# Altium PCB fastic-userboard.PcbDoc (part 1 of 2)
Units mm, origin at the board's own origin, x right, y up, seen from the top; angles counter-clockwise.
Board outline 60 x 60 mm, 4 copper layers (Top Layer, GND, HV, Bottom Layer), stack 1.539 mm thick; 133 components, 59 nets, 357 pads, 534 vias.
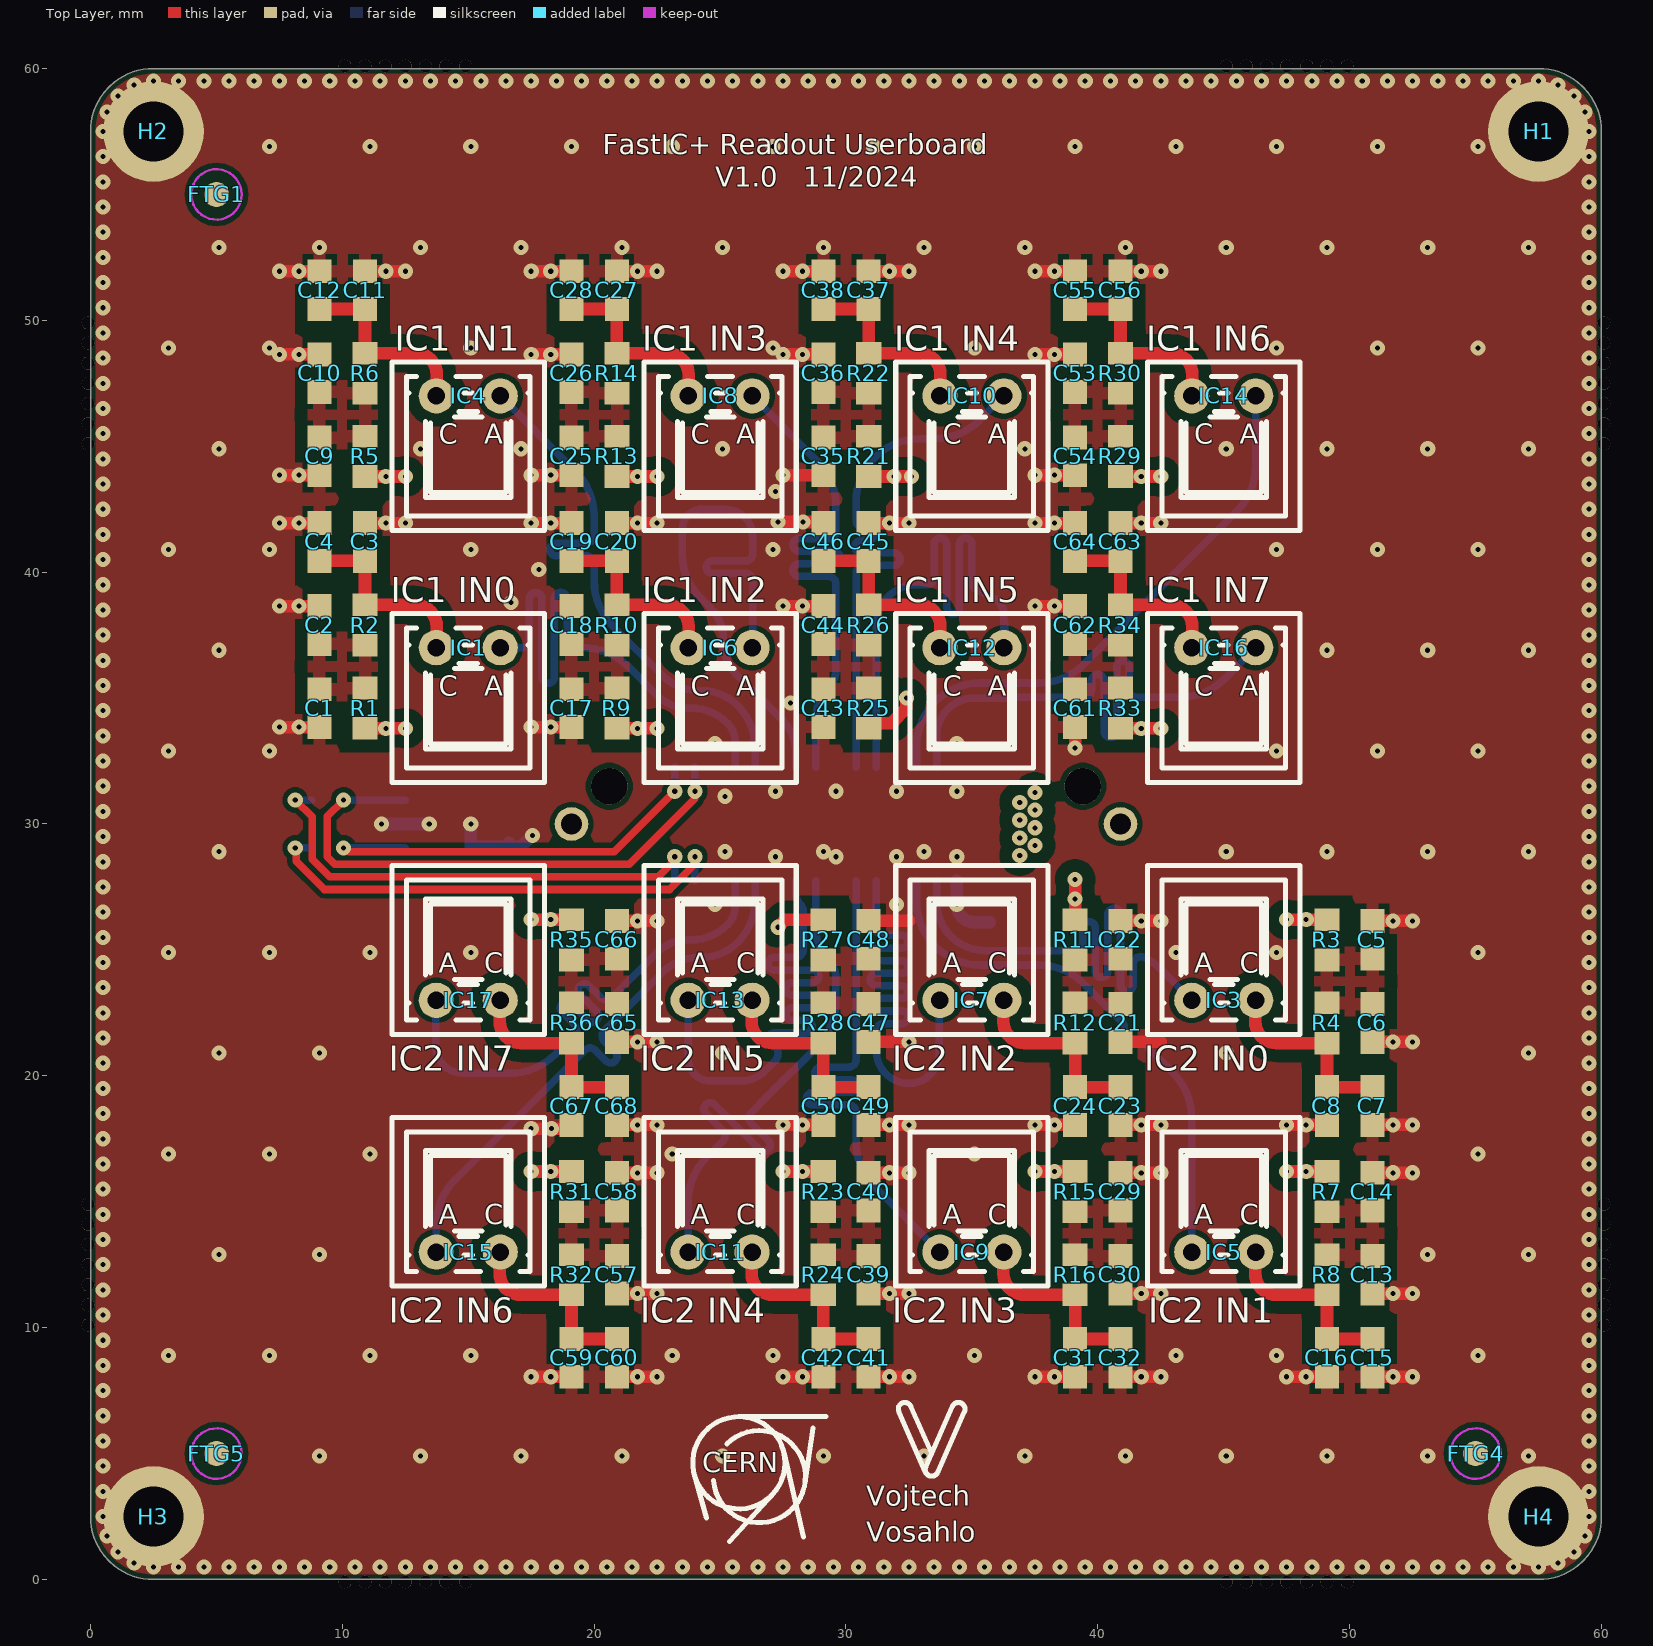
[diagram p0: Top Layer view]
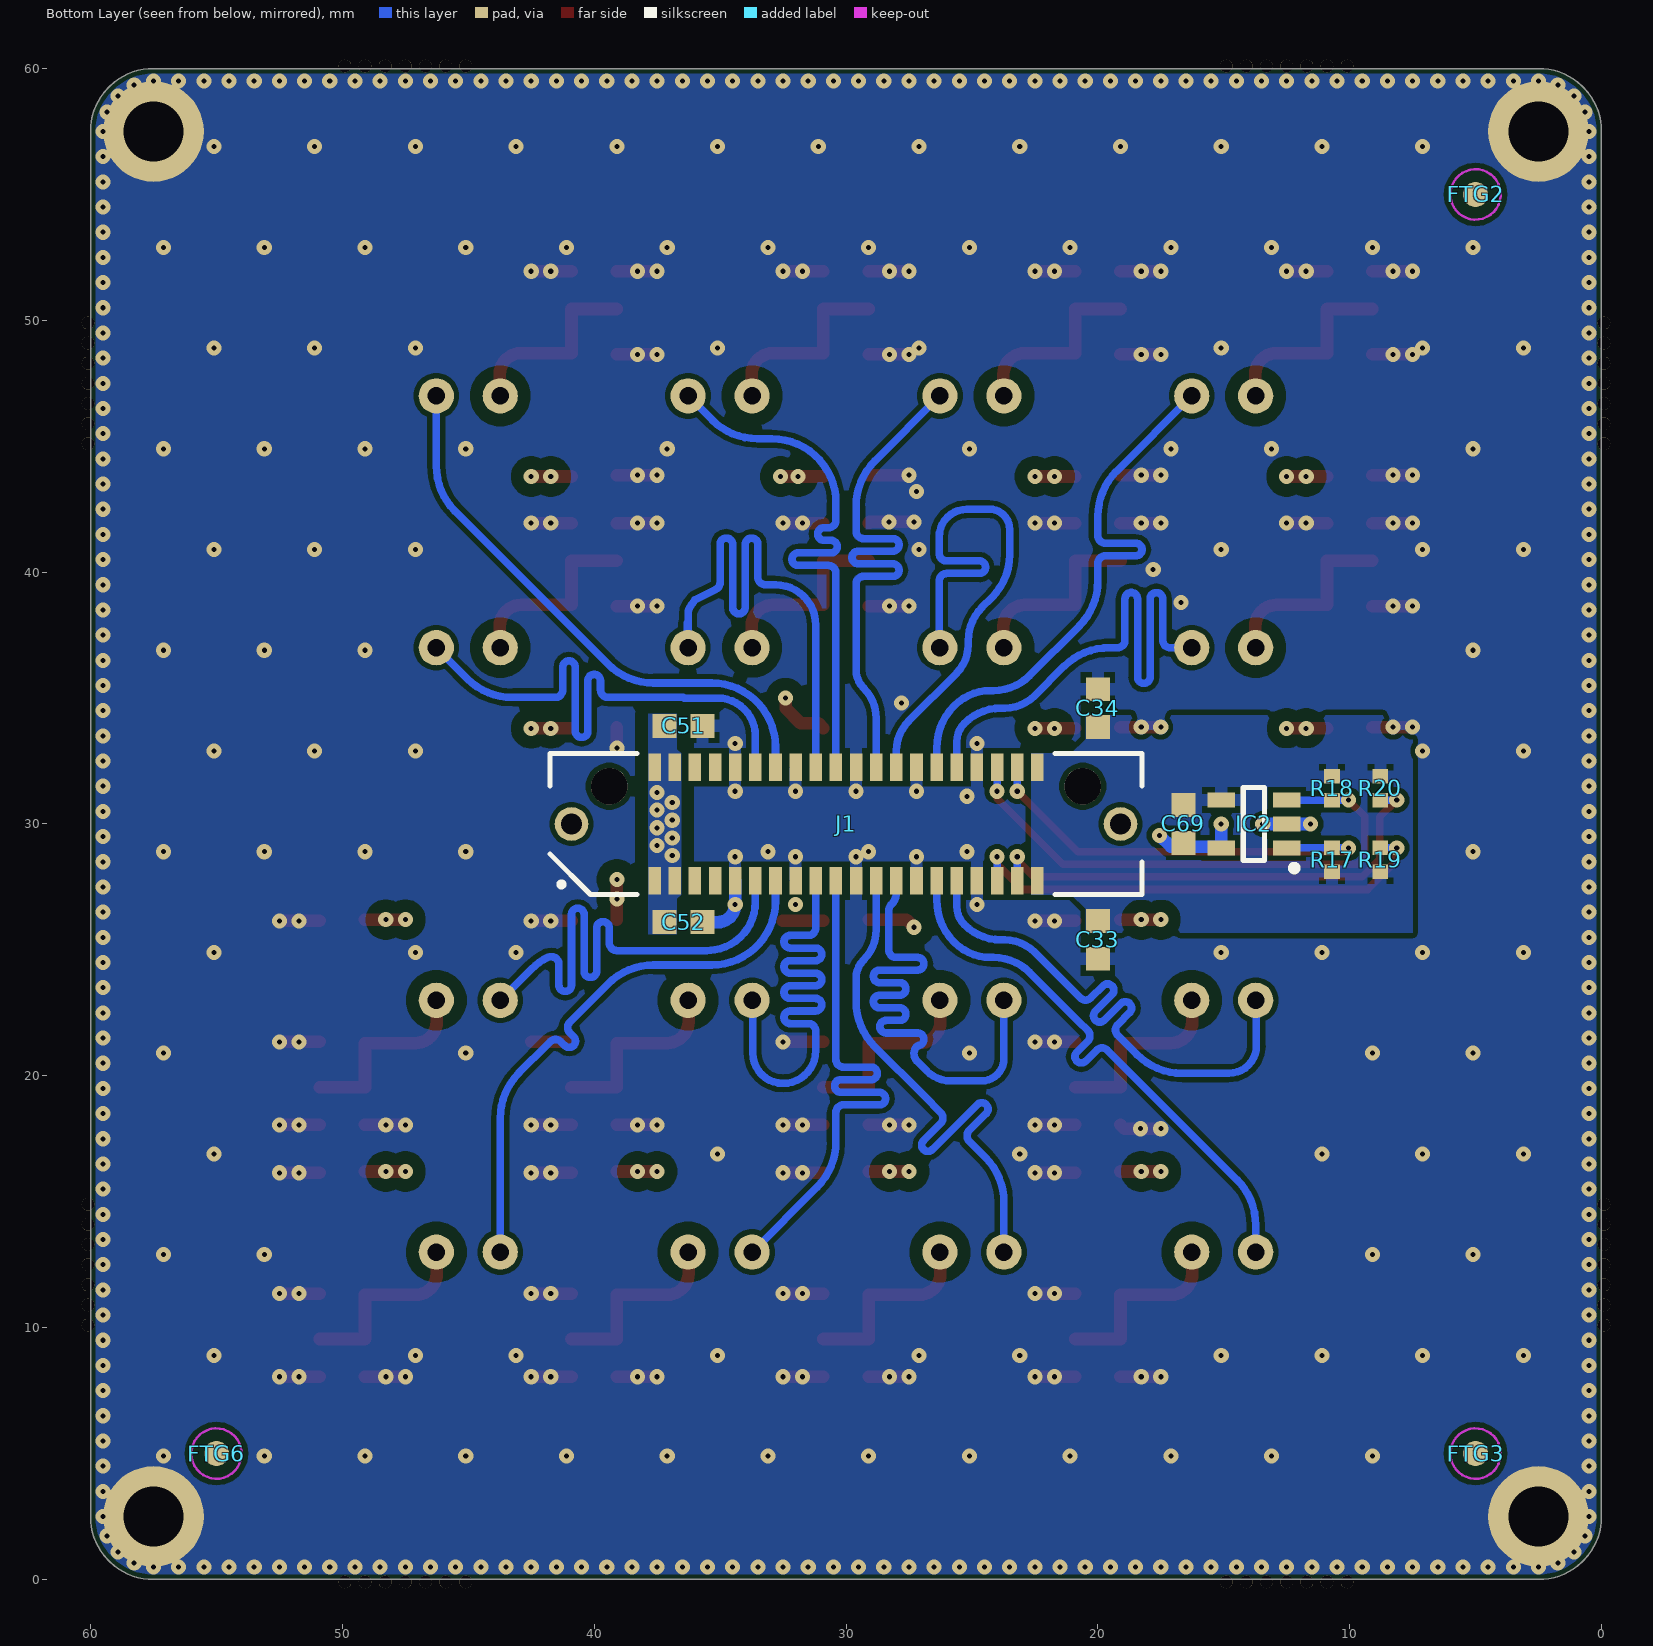
[diagram p1: Bottom Layer view, seen from below]
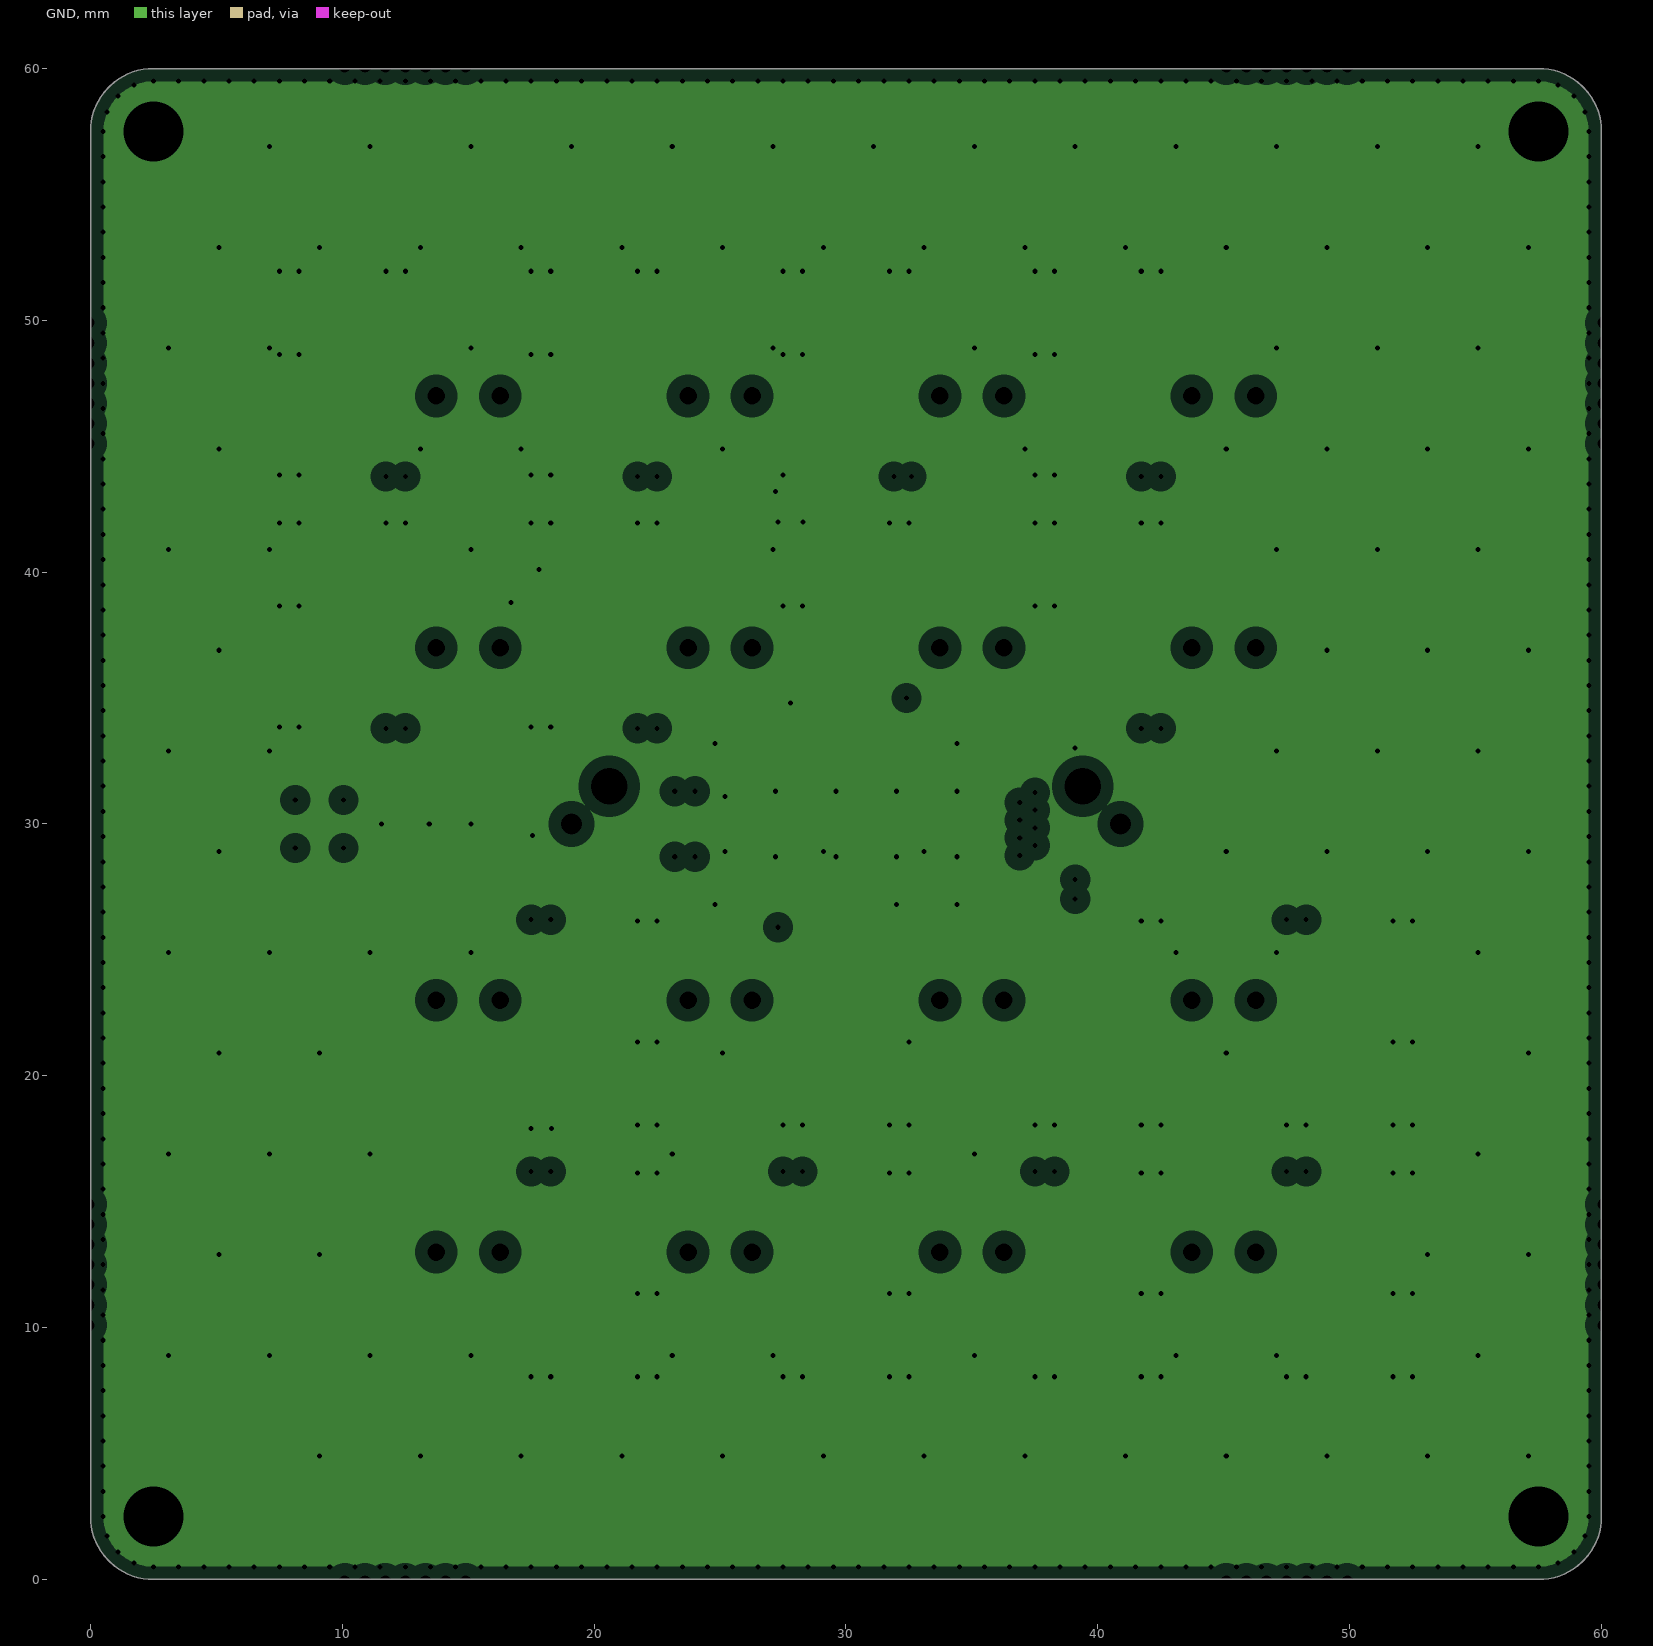
[diagram p2: GND, clearances drawn from the general rule]
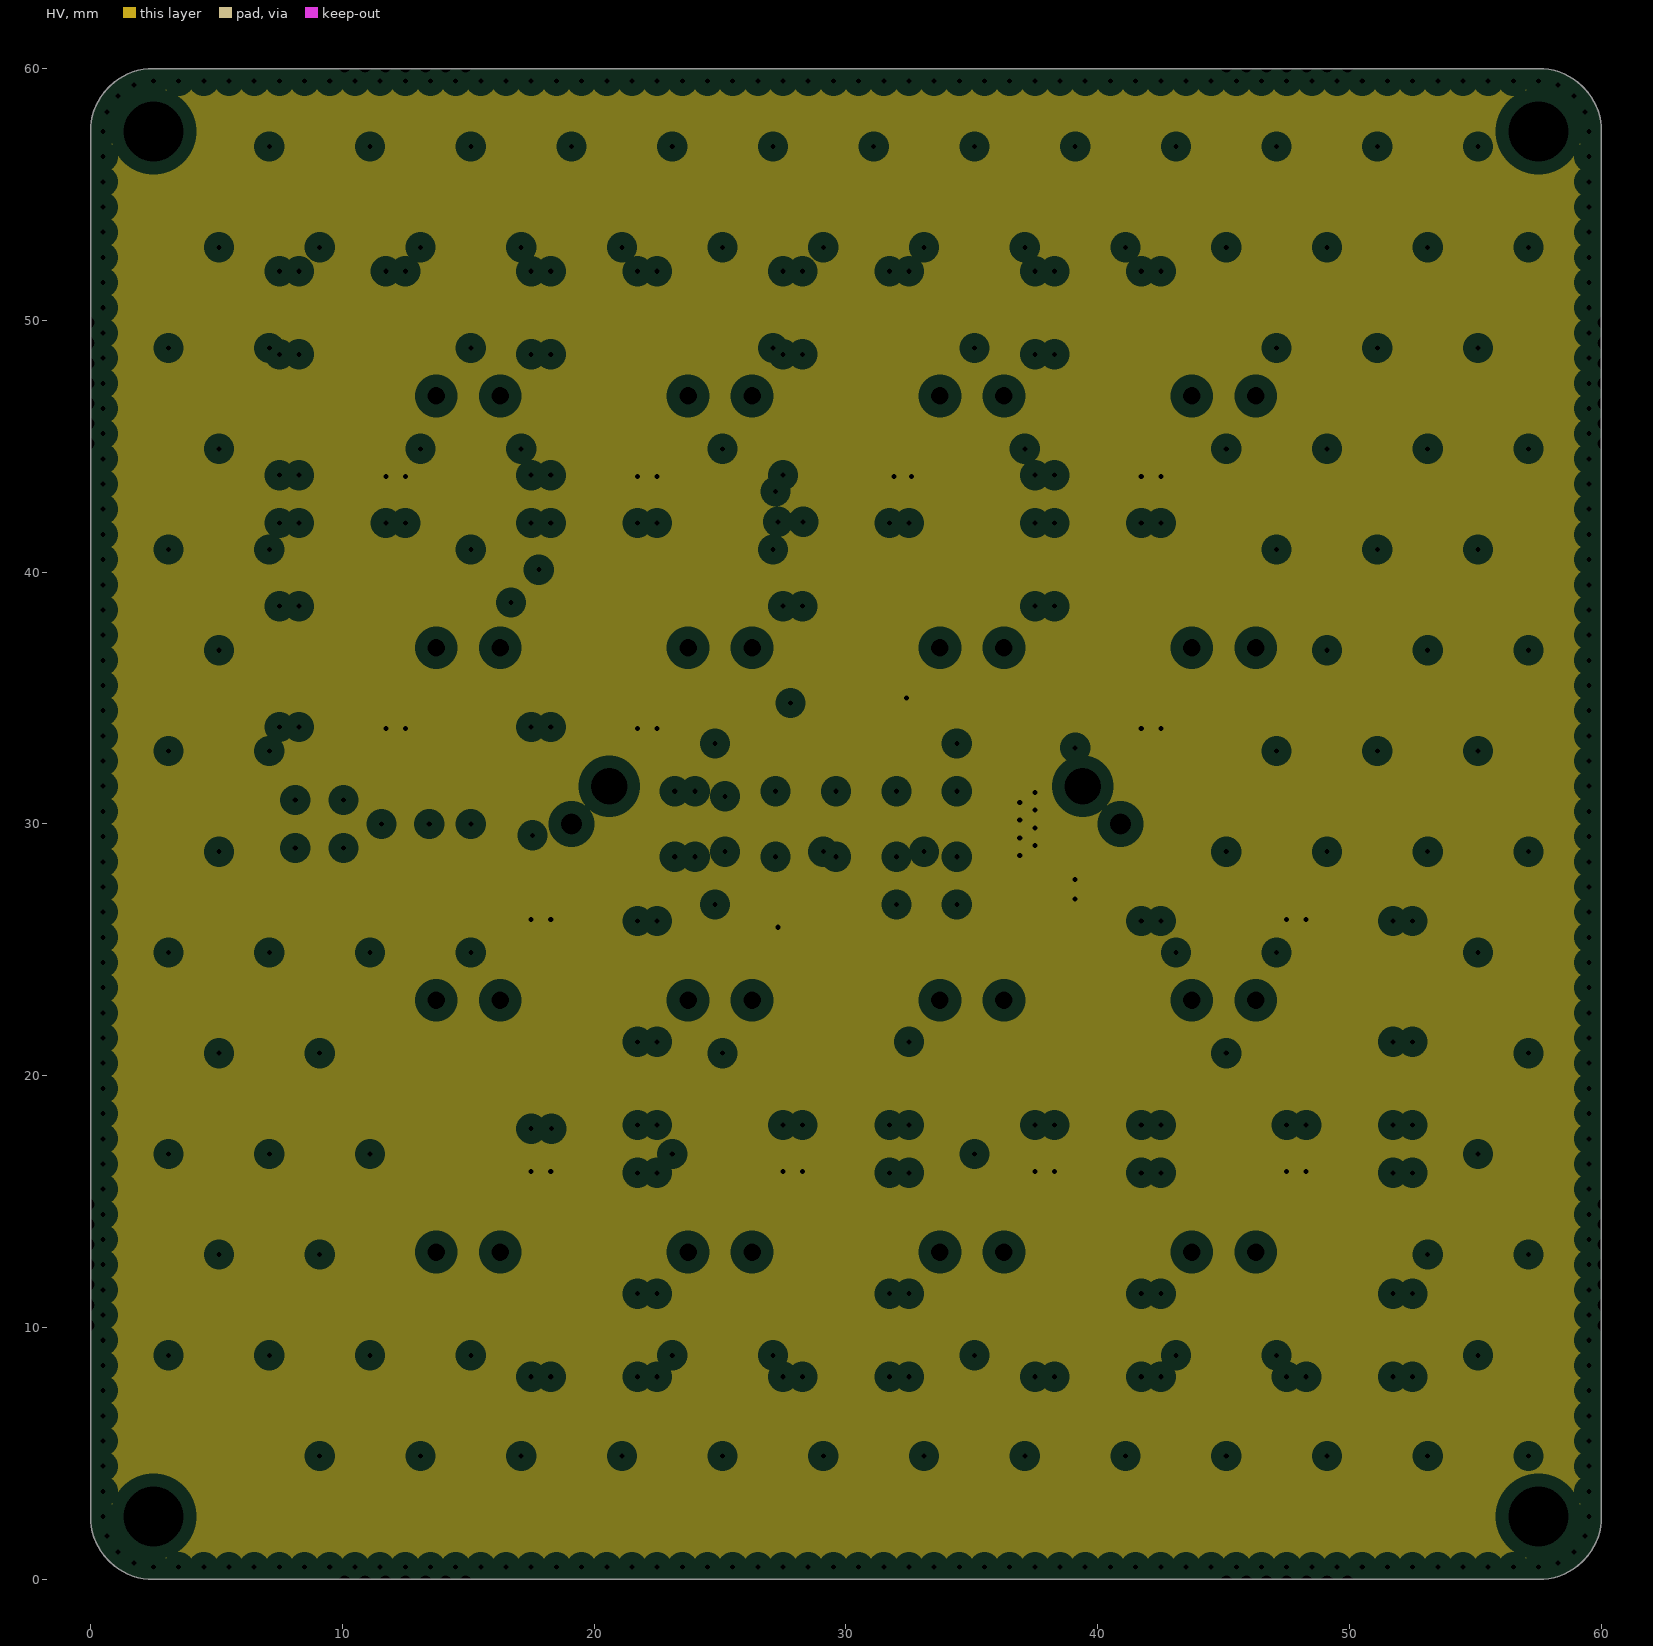
[diagram p3: HV, clearances drawn from the general rule]
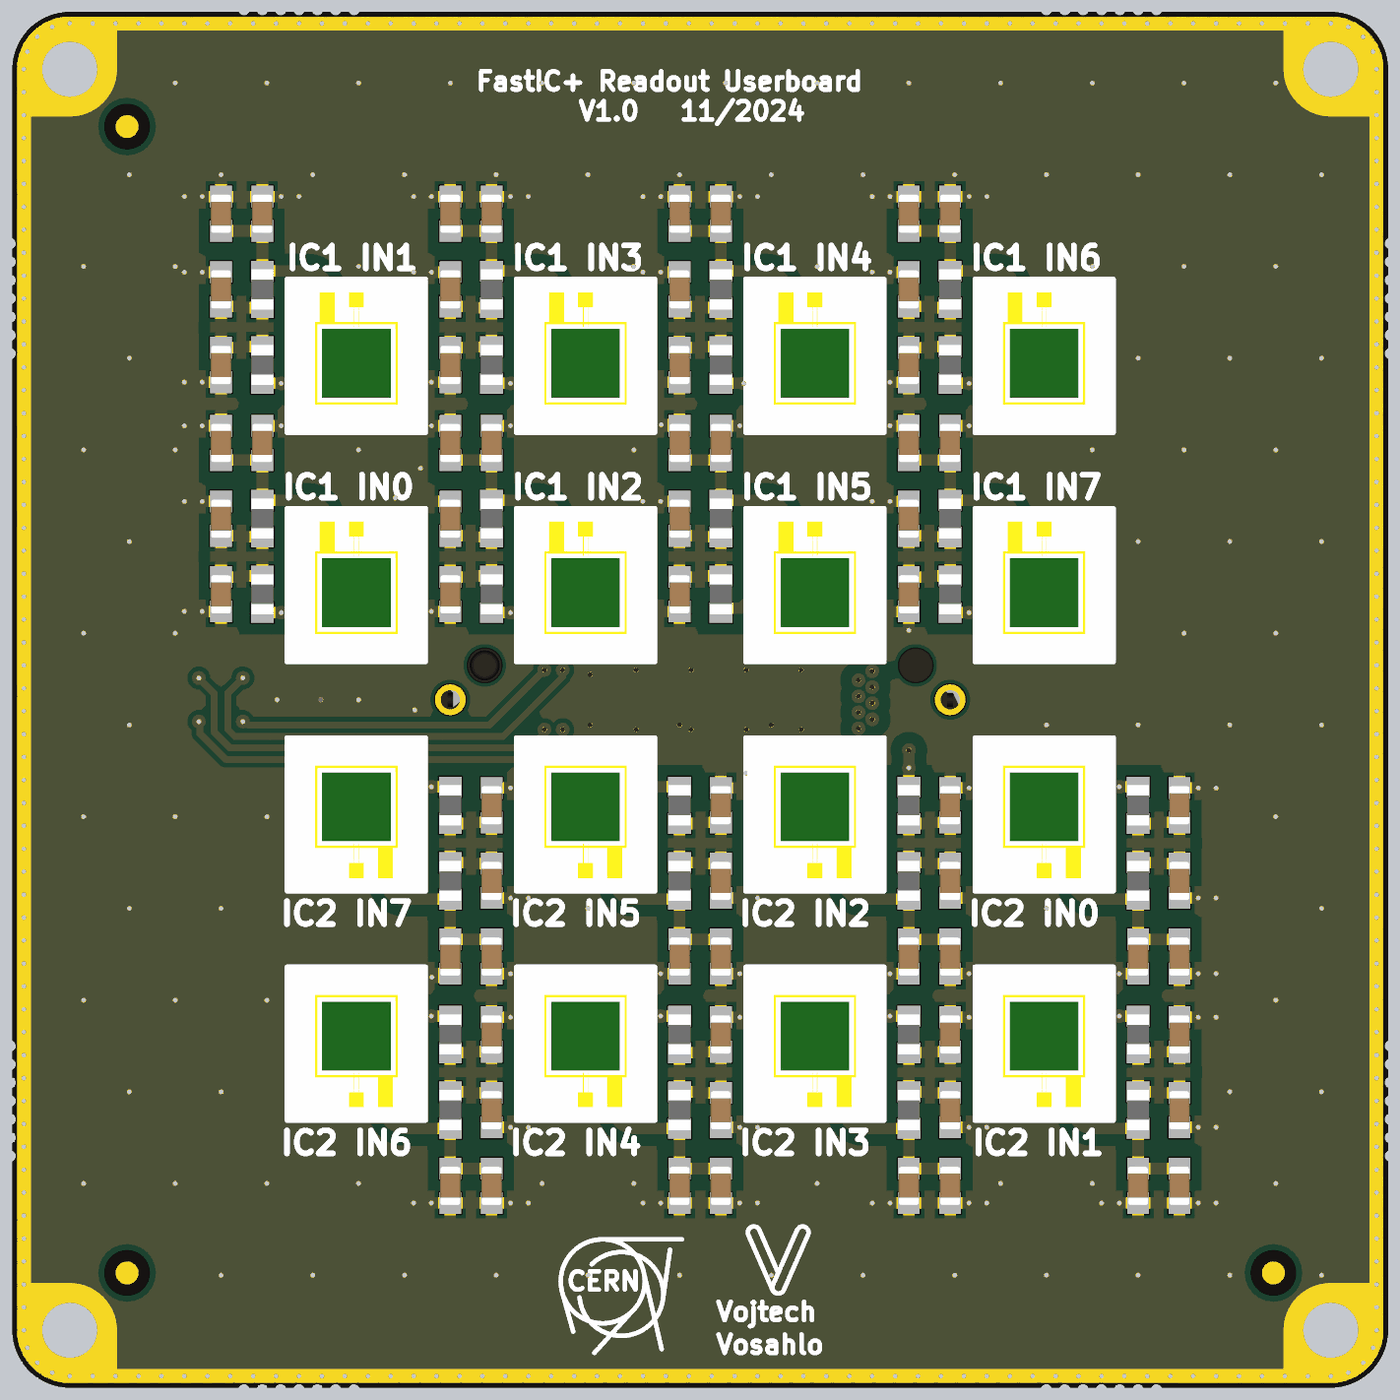
[diagram p4: 3D render of the assembled board from above, using the file's embedded part models]
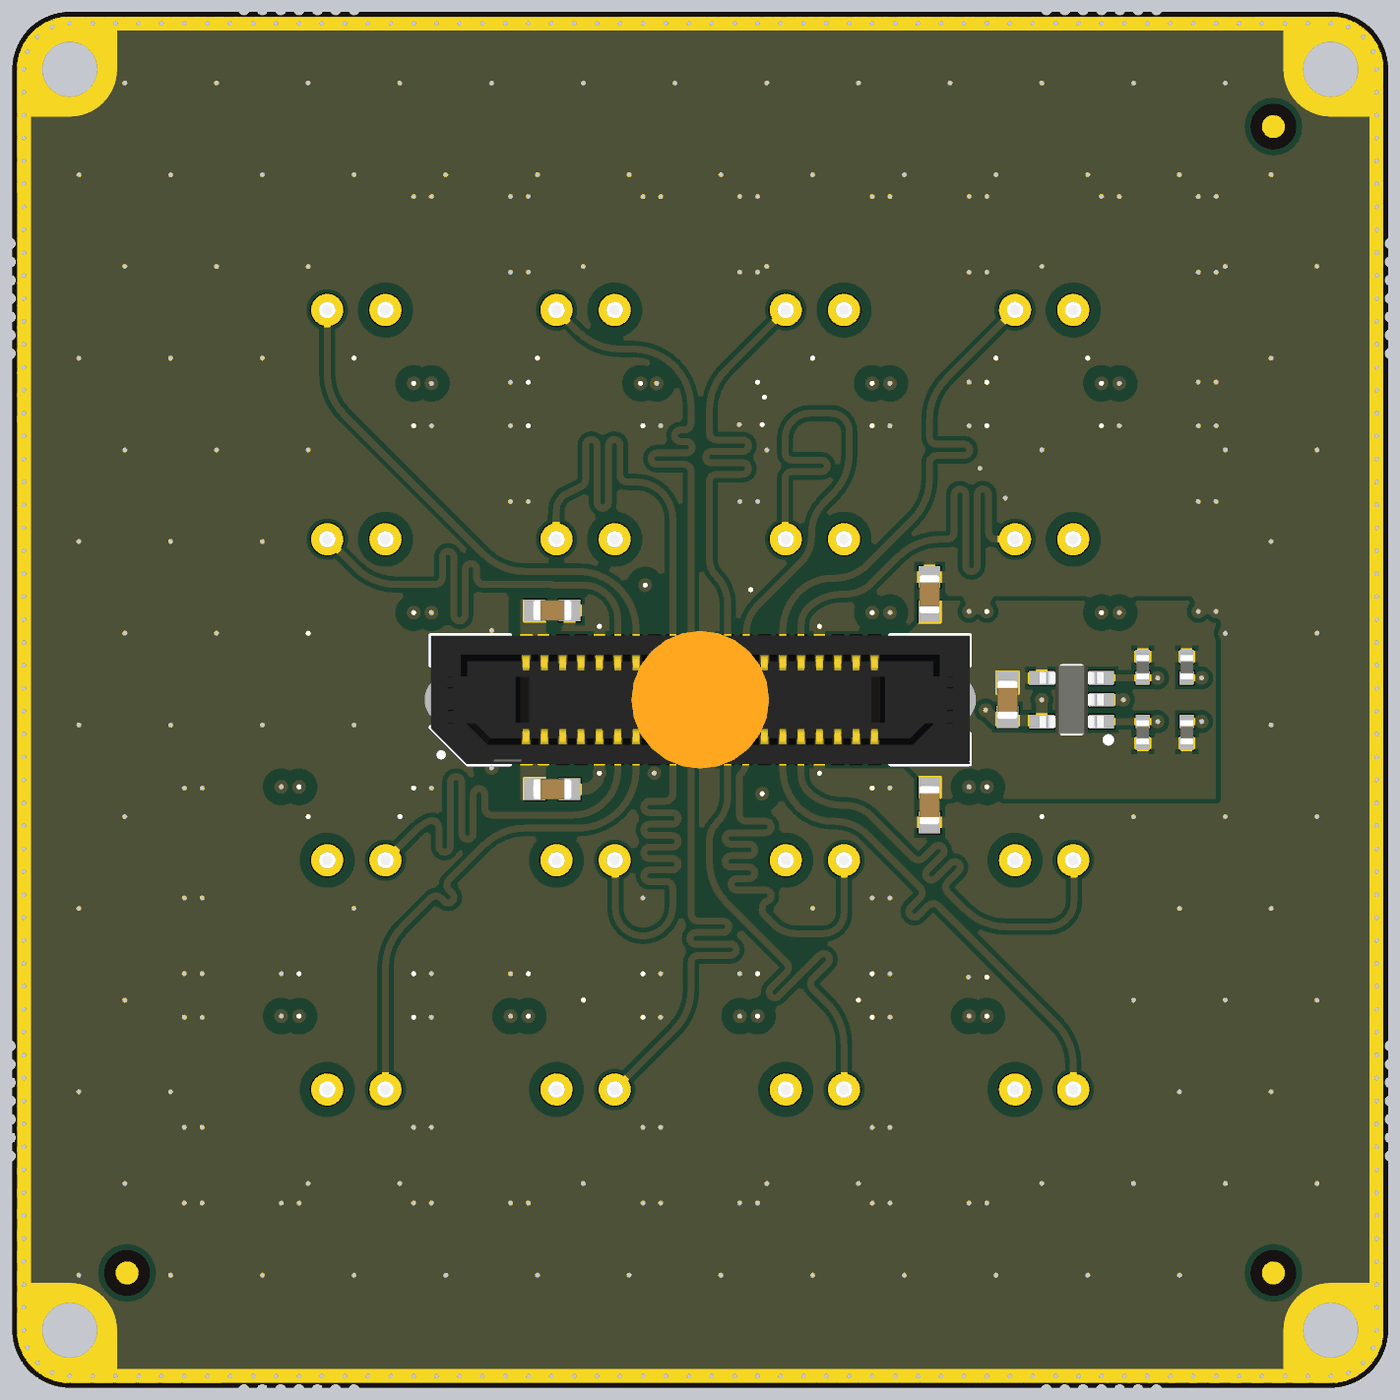
[diagram p5: 3D render of the assembled board from below, using the file's embedded part models]

## Layer stack, top to bottom
Top Solder: solder mask 0.0254, SM-001, Dk 4
Top Layer: signal copper 0.018
Dielectric 1 - PR7628: prepreg 0.1803, PP-021, Dk 4.7
Dielectric 2 - PR7628: prepreg 0.1803, PP-021, Dk 4.7
GND: plane copper 0.035, net GND
Dielectric 3 - Core FR4: core 0.7112, Core-039, Dk 4.8
HV: plane copper 0.035, net HV
Dielectric 4 - PR7628: prepreg 0.1803, PP-021, Dk 4.7
Dielectric 5 - PR7628: prepreg 0.1803, PP-021, Dk 4.7
Bottom Layer: signal copper 0.018
Bottom Solder: solder mask 0.0254, SM-001, Dk 4

## Board outline
2.5,0 cw(c2.5,2.5) 0,2.5 0,57.5 cw(c2.5,57.5) 2.5,60 57.5,60 cw(c57.5,57.5) 60,57.5 60,2.5 cw(c57.5,2.5) 57.5,0

## Design rules (kind name [scope] priority, off if disabled: settings)
AssemblyTestPointUsage [All] p1 off:
AssemblyTestpoint [All] p1 off: testpointundercomponent=TRUE minsize=1.016 maxsize=2.54 preferedsize=1.524 minholesize=0 maxholesize=1.016 preferedholesize=0.813 testpointgrid=0.025 usegrid=TRUE gridtolerance=0 allowsidetop=TRUE allowsidebottom=TRUE
BoardOutlineClearance BoardOutlineClearance_Mousebites [IsPad and not InAnyNet and not InRegionRelative(0,0,2362.20472,2362.20472)] p1: gap=0 ignorepadtopadclearanceinfootprint=FALSE
BoardOutlineClearance BoardOutlineClearance_Overlay [OnLayer('Top Overlay')] p2: gap=0 ignorepadtopadclearanceinfootprint=FALSE
BoardOutlineClearance [All] p3: gap=0.2 ignorepadtopadclearanceinfootprint=FALSE
Clearance Clearance_Mousebites [IsPad and not InAnyNet and not InRegionRelative(0,0,2362.20472,2362.20472) vs InNet('GND')] p1: gap=0 ignorepadtopadclearanceinfootprint=TRUE
Clearance Clearance_HV [InNetClass('HV') vs not (InNet('NetJ1_05') or InNet('NetJ1_07') or InNet('NetJ1_08') or InNet('NetJ1_06'))] p2: gap=0.5 ignorepadtopadclearanceinfootprint=TRUE
Clearance [All] p3: gap=0.2 ignorepadtopadclearanceinfootprint=TRUE
ComponentClearance [All] p1 off: gap=0.15 collisioncheckmode=3 verticalgap=0.15 showdistances=FALSE
DiffPairsRouting [All] p1: maxlimit=0.2 minlimit=0.2 mostfreqgap=0.2 toplayer_minwidth=0.18 toplayer_maxwidth=0.18 toplayer_prefwidth=0.18 bottomlayer_minwidth=0.18 bottomlayer_maxwidth=0.18 bottomlayer_prefwidth=0.18 impedanceprofiledriven=TRUE impedanceprofileid={FB560723-166B-4BAB-8495-9AA3CF4F6614} impedanceprofilevalue=90.000000 maxuncoupledlength=12.7
FabricationTestPointUsage [All] p1 off: valid=0 allowmultiple=FALSE
FabricationTestpoint [All] p1 off: side=3 testpointundercomponent=TRUE minsize=1.016 maxsize=2.54 preferedsize=1.524 minholesize=0 maxholesize=1.016 preferedholesize=0.813 testpointgrid=0.025 allowsidetop=TRUE allowsidebottom=TRUE usegrid=TRUE gridtolerance=0
HoleSize [All] p1: absolutevalues=TRUE maxlimit=5 minlimit=0.2 maxpercent=80.000 minpercent=20.000
HoleToHoleClearance HoleToHoleClearance_Mousebites [IsPad and not InAnyNet and not InRegionRelative(0,0,2362.20472,2362.20472)] p1: gap=0 allowstackedmicrovias=TRUE
HoleToHoleClearance [All] p2: gap=0.254 allowstackedmicrovias=TRUE
MinimumAnnularRing [All] p1: minimumring=0.15
MinimumSolderMaskSliver [All] p1: minsoldermaskwidth=0
PlaneClearance [All] p1: clearance=0.5
PlaneConnect PlaneConnect_HOLES [InComponent('H1') or InComponent('H2') or InComponent('H3') or InComponent('H4')] p1: planeconnectstyle=Direct reliefexpansion=0.508 reliefentries=4 reliefconductorwidth=0.254 reliefairgap=0.254
PlaneConnect [All] p2: pad.planeconnectstyle=Relief pad.reliefexpansion=0.508 pad.reliefentries=4 pad.reliefconductorwidth=0.3 pad.reliefairgap=0.2 via.planeconnectstyle=Direct via.reliefexpansion=0.508 via.reliefentries=4 via.reliefconductorwidth=0.254 via.reliefairgap=0.254
PolygonConnect PolygonConnect_decoupling [InNet('+3V3') vs InComponent('C69') or InComponent('C33') or InComponent('C34') or InComponent('J1')] p1: connectstyle=Direct reliefconductorwidth=0.254 reliefentries=4 polygonreliefangle="90 Angle" airgapwidth=0.254
PolygonConnect PolygonConnect_HOLES [InComponent('H1') or InComponent('H2') or InComponent('H3') or InComponent('H4')] p2: connectstyle=Direct reliefconductorwidth=0.254 reliefentries=4 polygonreliefangle="90 Angle" airgapwidth=0.254
PolygonConnect PolygonConnect_HV [InNet('HV') vs InComponent('C51') or InComponent('C52') or InComponent('J1')] p3: connectstyle=Direct reliefconductorwidth=0.254 reliefentries=4 polygonreliefangle="90 Angle" airgapwidth=0.254
PolygonConnect [All] p4: thpad.connectstyle=Relief thpad.reliefconductorwidth=0.5 thpad.reliefentries=4 thpad.polygonreliefangle="90 Angle" thpad.airgapwidth=0.3 smdpad.connectstyle=Relief smdpad.reliefconductorwidth=0.5 smdpad.reliefentries=4 smdpad.polygonreliefangle="90 Angle" smdpad.airgapwidth=0.2 via.connectstyle=Direct via.reliefconductorwidth=0.254 via.reliefentries=4 via.polygonreliefangle="90 Angle" via.airgapwidth=0.254
RoutingVias RoutingVias_OuterLayers [Not OnMid] p1: holewidth=0.2 width=0.4 viastyle="Through Hole" minholewidth=0.2 minwidth=0.4 maxholewidth=0.4 maxwidth=0.65
RoutingVias RoutingVias_InnerLayers [OnMid] p2: holewidth=0.2 width=0.4 viastyle="Through Hole" minholewidth=0.2 minwidth=0.4 maxholewidth=0.4 maxwidth=0.65
SilkToSilkClearance [All] p1 off: silktosilkclearance=0.05
SilkToSolderMaskClearance SilkscreenOverComponentPads [IsPad] p1: minsilkscreentomaskgap=0.05 clearancetoexposedcopper=TRUE
SolderMaskExpansion [All] p1: expansion=0.06 istentingtop=FALSE useseparateexpansions=TRUE expansionbottom=0.06 istentingbottom=FALSE
SupplyNets "Schematic Supply Nets_1" [InNet('HV')] p1: voltage=0.000
SupplyNets "Schematic Supply Nets_6" [InNet('+3V3')] p2: voltage=0.000
SupplyNets "Schematic Supply Nets_4" [InNet('GND')] p3: voltage=0.000
UnRoutedNet [All] p1: checkbadconnections=TRUE
Width ULPI [InNetClass('ULPI')] p1: maxlimit=0.18 minlimit=0.18 preferedwidth=0.18 impedanceprofiledriven=TRUE impedanceprofileid={517B4ECA-F916-4956-BA1D-CE408478A88D} impedanceprofilevalue=50.000000 minimp=50.000000 maximp=50.000000 favimp=50.000000
Width [All] p2: maxlimit=2 minlimit=0.1 preferedwidth=0.2
16 further rules are at their usual default settings.

## Classes and differential pairs
net class HV: HV NetC1_2 NetC3_2 NetC5_2 NetC7_2 NetC9_2 NetC11_2 NetC13_2 NetC15_2 NetC17_2 NetC19_2 NetC21_2 NetC23_2 NetC25_2 NetC27_2 NetC29_2 NetC31_2 NetC35_2 NetC37_2 NetC39_2 NetC41_2 NetC43_2 NetC45_2 NetC47_2 NetC49_2 NetC53_2 NetC55_2 NetC57_2 NetC59_2 NetC61_2 NetC63_2 NetC65_2 NetC67_2

## Components (designator, comment, footprint, x,y, rotation, side; value= is the part's Value field where it differs from the comment)
C1 "100nF" CAPC1608X90N 9.1,34.6 r90 top
C2 "100nF" CAPC1608X90N 9.1,37.9 r270 top
C3 "100nF" CAPC1608X90N 10.9,41.2 r270 top
C4 "100nF" CAPC1608X90N 9.1,41.2 r270 top
C5 "100nF" CAPC1608X90N 50.9,25.4 r270 top
C6 "100nF" CAPC1608X90N 50.9,22.1 r90 top
C7 "100nF" CAPC1608X90N 50.9,18.8 r90 top
C8 "100nF" CAPC1608X90N 49.1,18.8 r90 top
C9 "100nF" CAPC1608X90N 9.1,44.6 r90 top
C10 "100nF" CAPC1608X90N 9.1,47.9 r270 top
C11 "100nF" CAPC1608X90N 10.9,51.2 r270 top
C12 "100nF" CAPC1608X90N 9.1,51.2 r270 top
C13 "100nF" CAPC1608X90N 50.9,12.1 r90 top
C14 "100nF" CAPC1608X90N 50.9,15.4 r270 top
C15 "100nF" CAPC1608X90N 50.9,8.8 r90 top
C16 "100nF" CAPC1608X90N 49.1,8.8 r90 top
C17 "100nF" CAPC1608X90N 19.1,34.6 r90 top
C18 "100nF" CAPC1608X90N 19.1,37.9 r270 top
C19 "100nF" CAPC1608X90N 19.1,41.2 r270 top
C20 "100nF" CAPC1608X90N 20.9,41.2 r270 top
C21 "100nF" CAPC1608X90N 40.9,22.1 r90 top
C22 "100nF" CAPC1608X90N 40.9,25.4 r270 top
C23 "100nF" CAPC1608X90N 40.9,18.8 r90 top
C24 "100nF" CAPC1608X90N 39.1,18.8 r90 top
C25 "100nF" CAPC1608X90N 19.1,44.6 r90 top
C26 "100nF" CAPC1608X90N 19.1,47.9 r270 top
C27 "100nF" CAPC1608X90N 20.9,51.2 r270 top
C28 "100nF" CAPC1608X90N 19.1,51.2 r270 top
C29 "100nF" CAPC1608X90N 40.9,15.4 r270 top
C30 "100nF" CAPC1608X90N 40.9,12.1 r90 top
C31 "100nF" CAPC1608X90N 39.1,8.8 r90 top
C32 "100nF" CAPC1608X90N 40.9,8.8 r90 top
C33 "2.2uF" CAPC1608X90N 20,25.4 r270 bottom
C34 "2.2uF" CAPC1608X90N 20,34.6 r90 bottom
C35 "100nF" CAPC1608X90N 29.1,44.6 r90 top
C36 "100nF" CAPC1608X90N 29.1,47.9 r270 top
C37 "100nF" CAPC1608X90N 30.9,51.2 r270 top
C38 "100nF" CAPC1608X90N 29.1,51.2 r270 top
C39 "100nF" CAPC1608X90N 30.9,12.1 r90 top
C40 "100nF" CAPC1608X90N 30.9,15.4 r270 top
C41 "100nF" CAPC1608X90N 30.9,8.8 r90 top
C42 "100nF" CAPC1608X90N 29.1,8.8 r90 top
C43 "100nF" CAPC1608X90N 29.1,34.6 r90 top
C44 "100nF" CAPC1608X90N 29.1,37.9 r270 top
C45 "100nF" CAPC1608X90N 30.9,41.2 r270 top
C46 "100nF" CAPC1608X90N 29.1,41.2 r270 top
C47 "100nF" CAPC1608X90N 30.9,22.1 r90 top
C48 "100nF" CAPC1608X90N 30.9,25.4 r270 top
C49 "100nF" CAPC1608X90N 30.9,18.8 r90 top
C50 "100nF" CAPC1608X90N 29.1,18.8 r90 top
C51 "100nF" CAPC1608X90N 36.45,33.9 r0 bottom
C52 "100nF" CAPC1608X90N 36.45,26.1 r0 bottom
C53 "100nF" CAPC1608X90N 39.1,47.9 r270 top
C54 "100nF" CAPC1608X90N 39.1,44.6 r90 top
C55 "100nF" CAPC1608X90N 39.1,51.2 r270 top
C56 "100nF" CAPC1608X90N 40.9,51.2 r270 top
C57 "100nF" CAPC1608X90N 20.9,12.1 r90 top
C58 "100nF" CAPC1608X90N 20.9,15.4 r270 top
C59 "100nF" CAPC1608X90N 19.1,8.8 r90 top
C60 "100nF" CAPC1608X90N 20.9,8.8 r90 top
C61 "100nF" CAPC1608X90N 39.1,34.6 r90 top
C62 "100nF" CAPC1608X90N 39.1,37.9 r270 top
C63 "100nF" CAPC1608X90N 40.9,41.2 r270 top
C64 "100nF" CAPC1608X90N 39.1,41.2 r270 top
C65 "100nF" CAPC1608X90N 20.9,22.1 r90 top
C66 "100nF" CAPC1608X90N 20.9,25.4 r270 top
C67 "100nF" CAPC1608X90N 19.1,18.8 r90 top
C68 "100nF" CAPC1608X90N 20.9,18.8 r90 top
C69 "100nF" CAPC1608X90N 16.6,30 r90 bottom
FTG1 "Use only in PCB" FIDUCIAL_TOP_C100-200 5,55 r90 top
FTG2 "Use only in PCB" FIDUCIAL_TOP_C100-200 5,55 r90 bottom
FTG3 "Use only in PCB" FIDUCIAL_TOP_C100-200 5,5 r90 bottom
FTG4 "Use only in PCB" FIDUCIAL_TOP_C100-200 55,5 r90 top
FTG5 "Use only in PCB" FIDUCIAL_TOP_C100-200 5,5 r90 top
FTG6 "Use only in PCB" FIDUCIAL_TOP_C100-200 55,5 r90 bottom
H1 "Plated Hole" MTG240_400 57.5,57.5 r0 top
H2 "Plated Hole" MTG240_400 2.5,57.5 r0 top
H3 "Plated Hole" MTG240_400 2.5,2.5 r0 top
H4 "Plated Hole" MTG240_400 57.5,2.5 r0 top
IC1 "S13360-3050CS" HAMAMATSU_S13360-3050CS 15,35 r90 top
IC2 "24AA04T-I/OT" SOT95P280X145-5N 13.8,30 r0 bottom
IC3 "S13360-3050CS" HAMAMATSU_S13360-3050CS 45,25 r270 top
IC4 "S13360-3050CS" HAMAMATSU_S13360-3050CS 15,45 r90 top
IC5 "S13360-3050CS" HAMAMATSU_S13360-3050CS 45,15 r270 top
IC6 "S13360-3050CS" HAMAMATSU_S13360-3050CS 25,35 r90 top
IC7 "S13360-3050CS" HAMAMATSU_S13360-3050CS 35,25 r270 top
IC8 "S13360-3050CS" HAMAMATSU_S13360-3050CS 25,45 r90 top
IC9 "S13360-3050CS" HAMAMATSU_S13360-3050CS 35,15 r270 top
IC10 "S13360-3050CS" HAMAMATSU_S13360-3050CS 35,45 r90 top
IC11 "S13360-3050CS" HAMAMATSU_S13360-3050CS 25,15 r270 top
IC12 "S13360-3050CS" HAMAMATSU_S13360-3050CS 35,35 r90 top
IC13 "S13360-3050CS" HAMAMATSU_S13360-3050CS 25,25 r270 top
IC14 "S13360-3050CS" HAMAMATSU_S13360-3050CS 45,45 r90 top
IC15 "S13360-3050CS" HAMAMATSU_S13360-3050CS 15,15 r270 top
IC16 "S13360-3050CS" HAMAMATSU_S13360-3050CS 45,35 r90 top
IC17 "S13360-3050CS" HAMAMATSU_S13360-3050CS 15,25 r270 top
J1 "ERF8-020-09.0-L-DV-K-TR" SAMTEC_ERF8-020-09.0-L-DV-K-TR 30,30 r0 bottom
R1 "49R9" RESC1608X55N 10.9,34.6 r90 top
R2 "49R9" RESC1608X55N 10.9,37.9 r90 top
R3 "49R9" RESC1608X55N 49.1,25.4 r270 top
R4 "49R9" RESC1608X55N 49.1,22.1 r270 top
R5 "49R9" RESC1608X55N 10.9,44.6 r90 top
R6 "49R9" RESC1608X55N 10.9,47.9 r90 top
R7 "49R9" RESC1608X55N 49.1,15.4 r270 top
R8 "49R9" RESC1608X55N 49.1,12.1 r270 top
R9 "49R9" RESC1608X55N 20.9,34.6 r90 top
R10 "49R9" RESC1608X55N 20.9,37.9 r90 top
R11 "49R9" RESC1608X55N 39.1,25.4 r270 top
R12 "49R9" RESC1608X55N 39.1,22.1 r270 top
R13 "49R9" RESC1608X55N 20.9,44.6 r90 top
R14 "49R9" RESC1608X55N 20.9,47.9 r90 top
R15 "49R9" RESC1608X55N 39.1,15.4 r270 top
R16 "49R9" RESC1608X55N 39.1,12.1 r270 top
R17 "10k" RESC1005X40N 10.7,28.58 r270 bottom
R18 "10k" RESC1005X40N 10.7,31.42 r90 bottom
R19 "10k" RESC1005X40N 8.78,28.58 r270 bottom
R20 "10k" RESC1005X40N 8.78,31.42 r90 bottom
R21 "49R9" RESC1608X55N 30.9,44.6 r90 top
R22 "49R9" RESC1608X55N 30.9,47.9 r90 top
R23 "49R9" RESC1608X55N 29.1,15.4 r270 top
R24 "49R9" RESC1608X55N 29.1,12.1 r270 top
R25 "49R9" RESC1608X55N 30.9,34.6 r90 top
R26 "49R9" RESC1608X55N 30.9,37.9 r90 top
R27 "49R9" RESC1608X55N 29.1,25.4 r270 top
R28 "49R9" RESC1608X55N 29.1,22.1 r270 top
R29 "49R9" RESC1608X55N 40.9,44.6 r90 top
R30 "49R9" RESC1608X55N 40.9,47.9 r90 top
R31 "49R9" RESC1608X55N 19.1,15.4 r270 top
R32 "49R9" RESC1608X55N 19.1,12.1 r270 top
R33 "49R9" RESC1608X55N 40.9,34.6 r90 top
R34 "49R9" RESC1608X55N 40.9,37.9 r90 top
R35 "49R9" RESC1608X55N 19.1,25.4 r270 top
R36 "49R9" RESC1608X55N 19.1,22.1 r270 top

## Footprints (in the part's own frame and the unit in brackets; to place one, negate y for a bottom-side part, rotate by r counter-clockwise, add the part's x,y. Pads: shape width x height; smd on the part's side, far side on the other; paste and mask are expansions set on the pad)
CAPC1608X90N [mm] "Chip Capacitor, Body 1.6x0.8mm IPC Medium Density"
  rect 0.95x0.95 smd: 1(-0.75,0) 2(0.75,0)
  body extent -0.85,-0.45 0.85,0.45, height 0.9
FIDUCIAL_TOP_C100-200 [mm] "Round Fiducial Target, Top Layer, 1.0mm, Top Solder 2.0mm, Keepout =2.0mm"
  round 1 smd paste-0.51 mask+0.5: 1(0,0)
  Top Layer keep-out circle w0.1: c0,0 r1
HAMAMATSU_S13360-3050CS [mm] "3x3mm Single Element MPPC (Multi-Pixel Photon Counter)"
  round 1.4 hole 0.7: 1(2,-1.27) 2(2,1.27)
  silkscreen extent -3.35,-3.03 3.35,3.03, body extent -3.27,-2.95 3.28,2.95, height 2.2
MTG240_400 [mm] "Plated Through Hole: Hole Dia.=2.4mm Pad Dia.=4.0mm"
  round 4 hole 2.4: 1(0,0)
RESC1005X40N [mm] "Chip Resistor, EIA 0402, Metric 1005, Body 1.0x0.5mm, IPC Medium Density"
  rect 0.58x0.62 smd: 1(-0.47,0) 2(0.47,0)
  body extent -0.52,-0.27 0.53,0.28, height 0.4
RESC1608X55N [mm] "Chip Resistor, EIA 0603, Metric 1608, Body 1.6x0.8mm, IPC Medium Density"
  rect 0.9x1 smd: 1(-0.8,0) 2(0.8,0)
  body extent -0.87,-0.47 0.88,0.48, height 0.55
SAMTEC_ERF8-020-09.0-L-DV-K-TR [mm]
  rect 0.5x1.1 smd: 01(7.6,2.25) 02(7.6,-2.25) 03(6.8,2.25) 04(6.8,-2.25) 05(6,2.25) 06(6,-2.25) 07(5.2,2.25) 08(5.2,-2.25) 09(4.4,2.25) 10(4.4,-2.25) 11(3.6,2.25) 12(3.6,-2.25) 13(2.8,2.25) 14(2.8,-2.25) 15(2,2.25) 16(2,-2.25) 17(1.2,2.25) 18(1.2,-2.25) 19(0.4,2.25) 20(0.4,-2.25) 21(-0.4,2.25) 22(-0.4,-2.25) 23(-1.2,2.25) 24(-1.2,-2.25) 25(-2,2.25) 26(-2,-2.25) 27(-2.8,2.25) 28(-2.8,-2.25) 29(-3.6,2.25) 30(-3.6,-2.25) 31(-4.4,2.25) 32(-4.4,-2.25) 33(-5.2,2.25) 34(-5.2,-2.25) 35(-6,2.25) 36(-6,-2.25) 37(-6.8,2.25) 38(-6.8,-2.25) 39(-7.6,2.25) 40(-7.6,-2.25)
  round 1.338 hole 0.83: S1(-10.9,0) S2(10.9,0)
  round 1.45 hole 1.45 unplated: ""(-9.4,-1.5) ""(9.4,-1.5)
  silkscreen extent -11.75,-2.8 11.75,2.8, body extent -11.75,-3 11.75,2.99, height 9.29
SOT95P280X145-5N [mm] "SOT, 0.95mm pitch; 5 pin, 1.60mm W X 2.90mm L X 1.45mm H body, IPC Medium Density"
  rect 1.1x0.6 smd: 1(-1.3,0.95) 2(-1.3,0) 3(-1.3,-0.95) 4(1.3,-0.95) 5(1.3,0.95)
  silkscreen extent -1.72,-1.45 0.43,1.87, body extent -1.4,-1.5 1.4,1.5, height 1.45

## Part data
C1 C2 C3 C4 C5 C6 C7 C8 C9 C10 C11 C12 C13 C14 C15 C16 C17 C18 C19 C20 C21 C22 C23 C24 C25 C26 C27 C28 C29 C30 C31 C32 C35 C36 C37 C38 C39 C40 C41 C42 C43 C44 C45 C46 C47 C48 C49 C50 C51 C52 C53 C54 C55 C56 C57 C58 C59 C60 C61 C62 C63 C64 C65 C66 C67 C68 C69: library part CC0603_100NF_100V_10%_X7R, "Non-polarised capacitor", Case=0603, Manufacturer=GENERIC, Manufacturer1 ComponentHeight=0.9mm, Manufacturer1 Example=MURATA, Manufacturer1 Part Number=GRM188R72A104KA35D, Tolerance=±10%, Voltage=100V, Author="CERN DEM JLC", Component Type=Standard, CreateDate=12/11/2013, HelpURL=\\cern.ch\dfs\Applications\Altium\Datasheets\CC0603_MURATA_GRM188R72A104KA35D.pdf, LatestRevisionDate=12/11/2013, Manufacturer Part Number=CC0603_100NF_100V_10%_X7R, Mounted=Yes, Part Description="SMD Multilayer Chip Ceramic Capacitor", Part Number=CC0603_100NF_100V_10%_X7R, Pin Count=2, Sense=No, SMD=Yes, Socket=No, Status=None, TC=X7R
C33 C34: library part CC0603_2.2UF_10V_20%_X7R, "Non-polarised capacitor", Case=0603, Manufacturer=GENERIC, Manufacturer1 ComponentHeight=0.9mm, Manufacturer1 Example="TAIYO YUDEN", Manufacturer1 Part Number=LMK107B7225MA-T, Tolerance=±20%, Voltage=10V, Author="CERN DEM JLC", Component Type=Standard, CreateDate=6/22/2011, HelpURL=\\cern.ch\dfs\Applications\Altium\Datasheets\CC0603_X7R_TAIYO-YUDEN_HIGH-VALUE.pdf, LatestRevisionDate=6/27/2011, Manufacturer Part Number=CC0603_2.2UF_10V_20%_X7R, Mounted=Yes, Part Description="SMD Multilayer Chip Ceramic Capacitor", Part Number=CC0603_2.2UF_10V_20%_X7R, Pin Count=2, Sense=No, SMD=Yes, Socket=No, Status="Not Recommended", TC=X7R
FTG1 FTG2 FTG3 FTG4 FTG5 FTG6: library part FIDUCIAL_TARGET_C100-200, "Fiducial Target", Author="CERN DEM JLC", Component Type="Standard (No BOM)", ComponentHeight=0mm, CreateDate=09/02/2010, Family=Fiducial, HelpURL=Undefined, LatestRevisionDate=04/04/2012, Mounted=No, PackageDescription="Round Fiducial Target, Top Layer, 1.0mm, Top Solder 2.0mm, Keepout =2.0mm", Part Description="Round Fiducial Target, Top Layer, 1.0mm, Top Solder 2.0mm, Keepout =2.0mm", Part Number=FIDUCIAL_TARGET_C100-200, Pin Count=1, Sense=No, SMD=Yes, Socket=No, Status=None
H1 H2 H3 H4: library part PLATED_HOLE2.4_PAD4.0, "Single Terminal Socket", Author="CERN DEM JMW", Component Type="Standard (No BOM)", ComponentHeight=0mm, CreateDate=10/10/2011, Family="Plated Hole", HelpURL=Undefined, LatestRevisionDate=10/10/2011, Mounted=No, PackageDescription="Plated Through Hole: Hole Dia.=2.4mm Pad Dia.=4.0mm", Part Description="Plated Through Hole: Hole Dia.=2.4mm Pad Dia.=4.0mm", Part Number=PLATED_HOLE2.4_PAD4.0, Pin Count=1, Sense=No, SMD=No, Socket=No, Status=None
IC1 IC3 IC4 IC5 IC6 IC7 IC8 IC9 IC10 IC11 IC12 IC13 IC14 IC15 IC16 IC17: "Single Element MPPC (Multi-Pixel Photon Counter)", Manufacturer=HAMAMATSU, Author="CERN DEM BC", Bonding=No, Component Type=Standard, ComponentHeight=2.2mm, CreateDate=27/05/2020, Device=S13360-3050CS, HelpURL=\\cern.ch\dfs\Applications\Altium\Datasheets\S13360-3050CS.pdf, LatestRevisionDate=27/05/2020, Manufacturer Part Number=S13360-3050CS, Mounted=Yes, PackageDescription="3x3mm, Single Element MPPC (Multi-Pixel Photon Counter), Body 6.55 x 6.90 x 2.00mm", Part Description="3x3mm, 3584 Pixels, Single Element MPPC (Multi-Pixel Photon Counter)", Part Number=S13360-3050CS, Pin Count=2, PressFit=No, Sense=Yes, Sense Comment="Soldering Limitation and Cleaning Limitation", SMD=No, Socket=No
IC2: library part 24AA16T-E/OT, "1.7V-5.5V, 16K I2C Serial EEPROM", Case=SOT23-5, Manufacturer="MICROCHIP TECHNOLOGY", Author="CERN DEM BC", Bonding=No, Component Type=Standard, ComponentHeight=1.45mm, CreateDate=11/5/2020, Device=24AA04T-I/OT, HelpURL=\\cern.ch\dfs\Applications\Altium\Datasheets\24AA16T-E-OT.pdf, LatestRevisionDate=11/5/2020, Manufacturer Part Number=24AA16T-E/OT, Mounted=Yes, PackageDescription="SOT, 0.95mm Pitch; 5 Pin, 1.60mm W X 2.90mm L X 1.45mm H body, IPC Medium Density", Part Description="1.7V-5.5V, 16K I2C Serial EEPROM, Temperature Range -40°C to 125°C", Part Number=24AA04T-I/OT, Pin Count=5, PressFit=No, Sense=No, SMD=Yes, Socket=No
J1: Package=None, Availability=Unavailable, MP=ERF8-020-09.0-L-DV-K-TR, Price=None
R1 R2 R3 R4 R5 R6 R7 R8 R9 R10 R11 R12 R13 R14 R15 R16 R21 R22 R23 R24 R25 R26 R27 R28 R29 R30 R31 R32 R33 R34 R35 R36: library part R0603_49R9_1%_0.1W_100PPM, "Resistor - 1%", Case=0603, Manufacturer=GENERIC, Manufacturer1 ComponentHeight=0.55mm, Manufacturer1 Example="YAGEO PHYCOMP", Manufacturer1 Part Number=RC0603FR-0749R9L, Power=0.1W, Tolerance=±1%, Author="CERN DEM JLC", Component Type=Standard, CreateDate=11/21/2017, HelpURL=\\cern.ch\dfs\Applications\Altium\Datasheets\R0603_PHYCOMP_RC0603.pdf, LatestRevisionDate=11/21/2017, Manufacturer Part Number=R0603_49R9_1%_0.1W_100PPM, Mounted=Yes, Part Description="General Purpose Thick Film Chip Resistor", Part Number=R0603_49R9_1%_0.1W_100PPM, Pin Count=2, PressFit=No, Sense=No, SMD=Yes, Socket=No, Status=Preferred, TC=±100ppm/°C
R17 R18 R19 R20: library part R0402_10K_1%_0.0625W_100PPM, "Resistor - 1%", Case=0402, Manufacturer=GENERIC, Manufacturer1 ComponentHeight=0.4mm, Manufacturer1 Example="YAGEO PHYCOMP", Manufacturer1 Part Number=232270671003L, Power=0.0625W, Tolerance=±1%, Author="CERN DEM JLC", Component Type=Standard, CreateDate=12/3/2007, HelpURL=\\cern.ch\dfs\Applications\Altium\Datasheets\R0402_Phycomp_RC0402.pdf, LatestRevisionDate=10/17/2012, Manufacturer Part Number=R0402_10K_1%_0.0625W_100PPM, Mounted=Yes, Part Description="General Purpose Thick Film Chip Resistor", Part Number=R0402_10K_1%_0.0625W_100PPM, Pin Count=2, PressFit=No, Sense=No, SMD=Yes, Socket=No, Status="Not Recommended", TC=±100ppm/°C

## Free pads (board coordinates)
  round 0.5 hole 0.5 unplated mask+0: 5(-0.1,10.1) 5(-0.1,10.9) 5(-0.1,11.7) 5(-0.1,12.5) 5(-0.1,13.3) 5(-0.1,14.1) 5(-0.1,14.9) 5(-0.1,45.1) 5(-0.1,45.9) 5(-0.1,46.7) 5(-0.1,47.5) 5(-0.1,48.3) 5(-0.1,49.1) 5(-0.1,49.9) 5(10.1,-0.1) 5(10.1,60.1) 5(10.9,-0.1) 5(10.9,60.1) 5(11.7,-0.1) 5(11.7,60.1) 5(12.5,-0.1) 5(12.5,60.1) 5(13.3,-0.1) 5(13.3,60.1) 5(14.1,-0.1) 5(14.1,60.1) 5(14.9,-0.1) 5(14.9,60.1) 5(45.1,-0.1) 5(45.1,60.1) 5(45.9,-0.1) 5(45.9,60.1) 5(46.7,-0.1) 5(46.7,60.1) 5(47.5,-0.1) 5(47.5,60.1) 5(48.3,-0.1) 5(48.3,60.1) 5(49.1,-0.1) 5(49.1,60.1) 5(49.9,-0.1) 5(49.9,60.1) 5(60.1,10.1) 5(60.1,10.9) 5(60.1,11.7) 5(60.1,12.5) 5(60.1,13.3) 5(60.1,14.1) 5(60.1,14.9) 5(60.1,45.1) 5(60.1,45.9) 5(60.1,46.7) 5(60.1,47.5) 5(60.1,48.3) 5(60.1,49.1) 5(60.1,49.9)

## Via types
v1: diameter 0.6, hole 0.2, Top Layer to Bottom Layer, tented both sides, 534 vias

## Nets (pads, with @x,y where several pads share a name; then routed paths per layer and width w, separated by ;. In a path a pad name is that pad's centre, name@x,y a point inside that pad or via, vN(x,y) a via of type N, cw(c..) or ccw(c..) an arc to the next point about the centre after c; other vN are vias at no path point)
+3V3: C33.1 C34.1 C69.2 IC2.4 J1.39 J1.40 R17.2 R18.2 R19.2 R20.2
GND: C1.1 C2.1 C3.1 C4.1 C5.1 C6.1 C7.1 C8.1 C9.1 C10.1 C11.1 C12.1 C13.1 C14.1 C15.1 C16.1 C17.1 C18.1 C19.1 C20.1 C21.1 C22.1 C23.1 C24.1 C25.1 C26.1 C27.1 C28.1 C29.1 C30.1 C31.1 C32.1 C33.2 C34.2 C35.1 C36.1 C37.1 C38.1 C39.1 C40.1 C41.1 C42.1 C43.1 C44.1 C45.1 C46.1 C47.1 C48.1 C49.1 C50.1 C51.1 C52.1 C53.1 C54.1 C55.1 C56.1 C57.1 C58.1 C59.1 C60.1 C61.1 C62.1 C63.1 C64.1 C65.1 C66.1 C67.1 C68.1 C69.1 H1.1 H2.1 H3.1 H4.1 IC2.2 IC2.5 J1.09 J1.10 J1.15 J1.16 J1.21 J1.22 J1.27 J1.28 J1.33 J1.34 | length 107
  Top Layer w0.5: v1(7.5,33.85) C1.1 ; v1(7.5,38.65) C2.1 ; v1(7.5,41.95) C4.1 ; v1(7.5,43.85) C9.1 ; v1(7.5,48.65) C10.1 ; v1(7.5,51.95) C12.1 ; C3.1 v1(12.5,41.95) ; C11.1 v1(12.5,51.95) ; v1(17.5,8.05) C59.1 ; v1(17.5,17.9) v1(18.3,17.9) 18.95,17.9 C67.1 ; v1(17.5,33.85) C17.1 ; v1(17.5,41.95) C19.1 ; v1(17.5,43.85) C25.1 ; v1(17.5,48.65) C26.1 ; v1(17.5,51.95) C28.1 ; C60.1 v1(22.5,8.05) ; C57.1 v1(22.5,11.35) ; C58.1 v1(22.5,16.15) ; C68.1 v1(22.5,18.05) ; C65.1 v1(22.5,21.35) ; C66.1 v1(22.5,26.15) ; C20.1 v1(22.5,41.95) ; C27.1 v1(22.5,51.95) ; v1(27.3,42) v1(28.3,42) 29.05,42 C46.1 ; v1(27.5,8.05) C42.1 ; v1(27.5,18.05) C50.1 ; v1(27.5,38.65) C44.1 ; v1(27.5,43.85) C35.1 ; v1(27.5,48.65) C36.1 ; v1(27.5,51.95) C38.1 ; C41.1 v1(32.5,8.05) ; C39.1 v1(32.5,11.35) ; C40.1 v1(32.5,16.15) ; C49.1 v1(32.5,18.05) ; C47.1 v1(32.5,21.35) ; C48.1 32.5,26.15 ; C45.1 v1(32.5,41.95) ; C37.1 v1(32.5,51.95) ; v1(37.5,8.05) C31.1 ; v1(37.5,18.05) C24.1 ; v1(37.5,38.65) C62.1 ; v1(37.5,41.95) C64.1 ; v1(37.5,43.85) C54.1 ; v1(37.5,48.65) C53.1 ; v1(37.5,51.95) C55.1 ; v1(39.1,33.025) C61.1 ; C32.1 v1(42.5,8.05) ; C30.1 v1(42.5,11.35) ; C29.1 v1(42.5,16.15) ; C23.1 v1(42.5,18.05) ; C21.1 42.5,21.35 ; C22.1 v1(42.5,26.15) ; C63.1 v1(42.5,41.95) ; C56.1 v1(42.5,51.95) ; v1(47.5,8.05) C16.1 ; v1(47.5,18.05) C8.1 ; C15.1 v1(52.5,8.05) ; C13.1 v1(52.5,11.35) ; C14.1 v1(52.5,16.15) ; C7.1 v1(52.5,18.05) ; C6.1 v1(52.5,21.35) ; C5.1 v1(52.5,26.15)
  Bottom Layer w0.5: v1(11.55,30) IC2.2 v1(13.45,30) ; v1(15.1,30) IC2.5 15.15,29.1 16.45,29.1 C69.1 16.75,29.1 17.1,29.1 v1(17.55,29.55) ; J1.09 v1(34.4,26.8) ccw(c35.1,26.8) 35.1,26.1 C52.1
  other v1: 2.5,0.5 3.5,0.5 4.5,0.5 5.5,0.5 6.5,0.5 7.5,0.5 8.5,0.5 9.5,0.5 10.5,0.5 11.5,0.5 12.5,0.5 13.5,0.5 14.5,0.5 15.5,0.5 16.5,0.5 17.5,0.5 18.5,0.5 19.5,0.5 20.5,0.5 21.5,0.5 22.5,0.5 23.5,0.5 24.5,0.5 25.5,0.5 26.5,0.5 27.5,0.5 28.5,0.5 29.5,0.5 30.5,0.5 31.5,0.5 32.5,0.5 33.5,0.5 34.5,0.5 35.5,0.5 36.5,0.5 37.5,0.5 38.5,0.5 39.5,0.5 40.5,0.5 41.5,0.5 42.5,0.5 43.5,0.5 44.5,0.5 45.5,0.5 46.5,0.5 47.5,0.5 48.5,0.5 49.5,0.5 50.5,0.5 51.5,0.5 52.5,0.5 53.5,0.5 54.5,0.5 55.5,0.5 56.5,0.5 57.5,0.5 1.735,0.652 58.265,0.652 1.086,1.086 58.914,1.086 0.652,1.735 59.348,1.735 0.5,2.5 59.5,2.5 0.5,3.5 59.5,3.5 0.5,4.5 59.5,4.5 9.1,4.9 13.1,4.9 17.1,4.9 21.1,4.9 25.1,4.9 29.1,4.9 33.1,4.9 37.1,4.9 41.1,4.9 45.1,4.9 49.1,4.9 53.1,4.9 57.1,4.9 0.5,5.5 59.5,5.5 0.5,6.5 59.5,6.5 0.5,7.5 59.5,7.5 18.275,8.05 21.725,8.05 28.275,8.05 31.725,8.05 38.275,8.05 41.725,8.05 48.275,8.05 51.725,8.05 0.5,8.5 59.5,8.5 3.1,8.9 7.1,8.9 11.1,8.9 15.1,8.9 23.1,8.9 27.1,8.9 35.1,8.9 43.1,8.9 47.1,8.9 55.1,8.9 0.5,9.5 59.5,9.5 0.5,10.5 59.5,10.5 21.725,11.35 31.725,11.35 41.725,11.35 51.725,11.35 0.5,11.5 59.5,11.5 0.5,12.5 59.5,12.5 5.1,12.9 9.1,12.9 53.1,12.9 57.1,12.9 0.5,13.5 59.5,13.5 0.5,14.5 59.5,14.5 0.5,15.5 59.5,15.5 21.725,16.15 31.725,16.15 41.725,16.15 51.725,16.15 0.5,16.5 59.5,16.5 3.1,16.9 7.1,16.9 11.1,16.9 23.1,16.9 35.1,16.9 55.1,16.9 0.5,17.5 59.5,17.5 21.725,18.05 28.275,18.05 31.725,18.05 38.275,18.05 41.725,18.05 48.275,18.05 51.725,18.05 0.5,18.5 59.5,18.5 0.5,19.5 59.5,19.5 0.5,20.5 59.5,20.5 5.1,20.9 9.1,20.9 25.1,20.9 45.1,20.9 57.1,20.9 21.725,21.35 51.725,21.35 0.5,21.5 59.5,21.5 0.5,22.5 59.5,22.5 0.5,23.5 59.5,23.5 0.5,24.5 59.5,24.5 3.1,24.9 7.1,24.9 11.1,24.9 15.1,24.9 43.1,24.9 47.1,24.9 55.1,24.9 0.5,25.5 59.5,25.5 21.725,26.15 41.725,26.15 51.725,26.15 0.5,26.5 59.5,26.5 24.8,26.8 32,26.8 0.5,27.5 59.5,27.5 0.5,28.5 59.5,28.5 27.2,28.7 29.6,28.7 32,28.7 34.4,28.7 5.1,28.9 25.2,28.9 29.1,28.9 33.1,28.9 45.1,28.9 49.1,28.9 53.1,28.9 57.1,28.9 0.5,29.5 59.5,29.5 0.5,30.5 59.5,30.5 25.2,31.1 27.2,31.3 29.6,31.3 32,31.3 34.4,31.3 0.5,31.5 59.5,31.5 0.5,32.5 59.5,32.5 3.1,32.9 7.1,32.9 47.1,32.9 51.1,32.9 55.1,32.9 24.8,33.2 34.4,33.2 0.5,33.5 59.5,33.5 8.275,33.85 18.275,33.85 0.5,34.5 59.5,34.5 27.8,34.8 0.5,35.5 59.5,35.5 0.5,36.5 59.5,36.5 5.1,36.9 49.1,36.9 53.1,36.9 57.1,36.9 0.5,37.5 59.5,37.5 0.5,38.5 59.5,38.5 8.275,38.65 28.275,38.65 38.275,38.65 16.7,38.8 0.5,39.5 59.5,39.5 17.8,40.1 0.5,40.5 59.5,40.5 3.1,40.9 7.1,40.9 15.1,40.9 27.1,40.9 47.1,40.9 51.1,40.9 55.1,40.9 0.5,41.5 59.5,41.5 8.275,41.95 11.725,41.95 18.275,41.95 21.725,41.95 31.725,41.95 38.275,41.95 41.725,41.95 0.5,42.5 59.5,42.5 27.2,43.2 0.5,43.5 59.5,43.5 8.275,43.85 18.275,43.85 38.275,43.85 0.5,44.5 59.5,44.5 5.1,44.9 13.1,44.9 17.1,44.9 25.1,44.9 37.1,44.9 45.1,44.9 49.1,44.9 53.1,44.9 57.1,44.9 0.5,45.5 59.5,45.5 0.5,46.5 59.5,46.5 0.5,47.5 59.5,47.5 0.5,48.5 59.5,48.5 8.275,48.65 18.275,48.65 28.275,48.65 38.275,48.65 3.1,48.9 7.1,48.9 15.1,48.9 27.1,48.9 35.1,48.9 47.1,48.9 51.1,48.9 55.1,48.9 0.5,49.5 59.5,49.5 0.5,50.5 59.5,50.5 0.5,51.5 59.5,51.5 8.275,51.95 11.725,51.95 18.275,51.95 21.725,51.95 28.275,51.95 31.725,51.95 38.275,51.95 41.725,51.95 0.5,52.5 59.5,52.5 5.1,52.9 9.1,52.9 13.1,52.9 17.1,52.9 21.1,52.9 25.1,52.9 29.1,52.9 33.1,52.9 37.1,52.9 41.1,52.9 45.1,52.9 49.1,52.9 53.1,52.9 57.1,52.9 0.5,53.5 59.5,53.5 0.5,54.5 59.5,54.5 0.5,55.5 59.5,55.5 0.5,56.5 59.5,56.5 7.1,56.9 11.1,56.9 15.1,56.9 19.1,56.9 23.1,56.9 27.1,56.9 31.1,56.9 35.1,56.9 39.1,56.9 43.1,56.9 47.1,56.9 51.1,56.9 55.1,56.9 0.5,57.5 59.5,57.5 0.652,58.265 59.348,58.265 1.086,58.914 58.914,58.914 1.735,59.348 58.265,59.348 2.5,59.5 3.5,59.5 4.5,59.5 5.5,59.5 6.5,59.5 7.5,59.5 8.5,59.5 9.5,59.5 10.5,59.5 11.5,59.5 12.5,59.5 13.5,59.5 14.5,59.5 15.5,59.5 16.5,59.5 17.5,59.5 18.5,59.5 19.5,59.5 20.5,59.5 21.5,59.5 22.5,59.5 23.5,59.5 24.5,59.5 25.5,59.5 26.5,59.5 27.5,59.5 28.5,59.5 29.5,59.5 30.5,59.5 31.5,59.5 32.5,59.5 33.5,59.5 34.5,59.5 35.5,59.5 36.5,59.5 37.5,59.5 38.5,59.5 39.5,59.5 40.5,59.5 41.5,59.5 42.5,59.5 43.5,59.5 44.5,59.5 45.5,59.5 46.5,59.5 47.5,59.5 48.5,59.5 49.5,59.5 50.5,59.5 51.5,59.5 52.5,59.5 53.5,59.5 54.5,59.5 55.5,59.5 56.5,59.5 57.5,59.5
HV: C51.2 C52.2 J1.01 J1.02 J1.03 J1.04 R1.1 R3.1 R5.1 R7.1 R9.1 R11.1 R13.1 R15.1 R21.1 R23.1 R25.1 R27.1 R29.1 R31.1 R33.1 R35.1 | length 26.7
  Top Layer w0.5: R1.1 v1(12.5,33.8) ; R5.1 v1(12.5,43.8) ; v1(17.5,16.2) R31.1 ; v1(17.5,26.2) R35.1 ; R9.1 v1(22.5,33.8) ; R13.1 v1(22.5,43.8) ; v1(27.3,25.9) 27.6,26.2 R27.1 ; v1(27.5,16.2) R23.1 ; R25.1 31.1,34 31.8,34 32.4,34.6 v1(32.4,35) ; R21.1 v1(31.9,43.8) v1(32.6,43.8) ; v1(37.5,16.2) R15.1 ; R11.1 v1(39.1,27.8) ; R33.1 v1(42.5,33.8) ; R29.1 v1(42.5,43.8) ; v1(47.5,16.2) R7.1 ; v1(47.5,26.2) R3.1
  other v1: 18.275,16.2 28.275,16.2 38.275,16.2 48.275,16.2 18.275,26.2 48.275,26.2 39.1,27.025 36.9,28.75 37.5,29.15 36.9,29.45 37.5,29.85 36.9,30.15 37.5,30.55 36.9,30.85 37.5,31.25 11.725,33.8 21.725,33.8 41.725,33.8 11.725,43.8 21.725,43.8 41.725,43.8
ID0/SDA: IC2.3 J1.36 R18.1 | length 22
  Top Layer w0.3: v1(10.05,30.95) 9.4,30.3 9.4,28.7 9.7,28.4 21.4,28.4 24,31 v1(24,31.3)
  Bottom Layer w0.3: v1(10.05,30.95) R18.1 IC2.3 ; v1(24,31.3) J1.36
ID1/SCL: IC2.1 J1.38 R17.1 | length 17.6
  Top Layer w0.3: v1(10.05,29.05) 10.104,29.05 10.254,28.9 20.8,28.9 v1(23.2,31.3)
  Bottom Layer w0.3: v1(10.05,29.05) R17.1 IC2.1 ; v1(23.2,31.3) J1.38
ID2: J1.35 R19.1 | length 19.2
  Top Layer w0.3: v1(8.13,29.05) 8.168,29.012 8.168,28.518 9.286,27.4 23,27.4 24,28.4 v1(24,28.7)
  Bottom Layer w0.3: v1(8.13,29.05) R19.1 ; J1.35 v1(24,28.7)
ID3: J1.37 R20.1 | length 19.3
  Top Layer w0.3: v1(8.13,30.95) 8.8,30.28 8.8,28.593 9.493,27.9 22.541,27.9 23.1,28.459 23.1,28.546 23.2,28.646 v1(23.2,28.7)
  Bottom Layer w0.3: v1(8.13,30.95) R20.1 ; J1.37 v1(23.2,28.7)
IN0_FASTIC1: IC1.1 J1.32 | length 22.5
  Bottom Layer w0.3: IC1.1 16.973,37 17.123,37 ccw(c17.123,37.3) 17.423,37.3 17.423,38.943 cw(c17.673,38.943) 17.923,38.943 17.923,35.836 ccw(c18.173,35.836) 18.423,35.836 18.423,38.943 cw(c18.673,38.943) 18.923,38.943 18.923,37.3 ccw(c19.223,37.3) 19.223,37 19.548,37 19.567,37 cw(c19.548,34.46) 19.717,36.994 cw(c19.548,34.46) 19.745,36.992 cw(c19.548,34.46) 19.8,36.988 cw(c19.548,34.46) 21.344,36.256 22.505,35.095 ccw(c23.7,36.29) 23.7,34.6 23.851,34.6 cw(c23.851,32.551) 25.3,34 cw(c24.576,33.276) 25.6,33.276 J1.32
IN0_FASTIC2: IC3.1 J1.11 | length 22.4
  Bottom Layer w0.3: J1.11 33.6,26.9 ccw(c35.525,26.9) 35.216,25 ccw(c35.525,26.9) 35.525,24.975 38.5,24.975 39.1,24.975 ccw(c39.1,25.275) 39.4,25.275 39.4,25.875 cw(c39.65,25.875) 39.9,25.875 39.9,24.157 ccw(c40.15,24.157) 40.4,24.157 40.4,26.407 cw(c40.65,26.407) 40.9,26.407 40.9,23.599 ccw(c41.15,23.599) 41.4,23.599 41.4,24.429 cw(c41.7,24.429) 41.77,24.72 41.85,24.701 cw(c40.703,22.435) 42,24.619 cw(c40.703,22.435) 42.499,24.231 IC3.1
IN1_FASTIC1: IC4.1 J1.30 | length 22.5
  Bottom Layer w0.3: IC4.1 19.256,44.014 cw(c17.46,42.218) 20,42.218 20,42.1 20,41.45 cw(c19.7,41.45) 19.7,41.15 18.495,41.15 ccw(c18.495,40.9) 18.495,40.65 19.7,40.65 cw(c19.7,40.35) 20,40.35 20,39.7 20,39.652 ccw(c22.54,39.652) 20.744,37.856 22.7,35.9 ccw(c24.149,37.349) 24.149,35.3 24.251,35.3 cw(c24.251,33.251) 25.7,34.7 cw(c24.01,33.01) 26.4,33.01 J1.30
IN1_FASTIC2: IC5.1 J1.13 | length 22.5
  Bottom Layer w0.3: J1.13 32.8,26.94 ccw(c35.34,26.94) 35.34,24.4 37.648,24.4 cw(c37.648,21.86) 39.444,23.656 40.5,22.6 40.966,22.134 cw(c40.754,21.922) 40.966,21.71 40.814,21.557 ccw(c40.991,21.38) 40.814,21.204 ccw(c40.991,21.38) 41.167,21.204 41.32,21.356 cw(c41.532,21.144) 41.744,21.356 41.85,21.25 42.986,20.114 cw(c41.19,18.318) 43.73,18.318 IC5.1
IN2_FASTIC1: IC6.1 J1.26 | length 22.5
  Bottom Layer w0.3: IC6.1 ccw(c26.27,37.03) 26.3,37.03 26.3,39.1 26.3,39.65 ccw(c26,39.65) 26,39.95 24.706,39.95 cw(c24.706,40.2) 24.706,40.45 26,40.45 ccw(c26,40.75) 26.3,40.75 26.3,41.4 ccw(c25.2,41.4) 25.2,42.5 24.3,42.5 ccw(c24.3,41.7) 23.5,41.7 23.5,40.7 ccw(c25.914,40.7) 24.207,38.993 24.6,38.6 cw(c23.284,37.284) 25.145,37.284 25.145,37.112 ccw(c26.732,37.112) 25.61,35.99 27.5,34.1 cw(c26.293,32.893) 28,32.893 J1.26
IN2_FASTIC2: IC7.1 J1.17 | length 22.6
  Bottom Layer w0.3: J1.17 31.2,26.425 31.2,25.875 ccw(c31.5,25.875) 31.5,25.575 32.213,25.575 cw(c32.213,25.325) 32.213,25.075 31.214,25.075 ccw(c31.214,24.825) 31.214,24.575 32.213,24.575 cw(c32.213,24.325) 32.213,24.075 31.214,24.075 ccw(c31.214,23.825) 31.214,23.575 32.213,23.575 cw(c32.213,23.325) 32.213,23.075 31.214,23.075 ccw(c31.214,22.825) 31.214,22.575 32.213,22.575 cw(c32.213,22.325) 32.213,22.075 31.5,22.075 ccw(c31.5,21.775) 31.2,21.775 31.2,21.125 31.2,21 ccw(c32.5,21) 32.5,19.7 ccw(c32.5,20.9) 33.7,20.9 33.7,22.97 cw(c33.73,22.97) IC7.1
IN3_FASTIC1: IC8.1 J1.24 | length 22.5
  Bottom Layer w0.3: IC8.1 28.856,44.414 cw(c27.06,42.618) 29.6,42.618 29.6,42.283 29.6,41.633 cw(c29.3,41.633) 29.3,41.333 28.143,41.333 ccw(c28.143,41.083) 28.143,40.833 29.512,40.833 cw(c29.512,40.583) 29.512,40.333 28.143,40.333 ccw(c28.143,40.083) 28.143,39.833 29.3,39.833 cw(c29.3,39.533) 29.6,39.533 29.6,38.227 29.6,36.124 cw(c28.576,36.124) 29.3,35.4 ccw(c30.507,34.193) 28.8,34.193 J1.24
IN3_FASTIC2: IC9.1 J1.19 | length 22.5
  Bottom Layer w0.3: J1.19 30.4,21.542 30.4,20.646 cw(c30.1,20.646) 30.1,20.346 29.003,20.346 ccw(c29.003,20.096) 29.003,19.846 30.205,19.846 cw(c30.205,19.596) 30.205,19.346 28.677,19.346 ccw(c28.677,19.096) 28.677,18.846 30.1,18.846 cw(c30.1,18.546) 30.4,18.546 30.4,18.396 30.4,17.382 ccw(c32.94,17.382) 31.144,15.586 IC9.1
IN4_FASTIC1: IC10.1 J1.20 | length 22.6
  Bottom Layer w0.3: J1.20 30.4,39.317 30.4,39.967 cw(c30.7,39.967) 30.7,40.267 31.895,40.267 ccw(c31.895,40.517) 31.895,40.767 30.598,40.767 cw(c30.598,41.017) 30.598,41.267 30.875,41.267 ccw(c30.875,41.517) 30.875,41.767 30.7,41.767 cw(c30.7,42.067) 30.4,42.067 30.4,42.65 30.4,42.76 cw(c32.94,42.76) 32.94,45.3 33.518,45.3 ccw(c33.518,47.84) 35.314,46.044 IC10.1
IN4_FASTIC2: IC11.1 J1.23 | length 22.5
  Bottom Layer w0.3: IC11.1 23.73,14.978 cw(c26.27,14.978) 24.474,16.774 25,17.3 25.106,17.406 ccw(c24.894,17.618) 25.106,17.83 24.432,18.504 cw(c24.609,18.681) 24.432,18.858 cw(c24.609,18.681) 24.786,18.858 26.57,17.074 ccw(c26.746,17.251) 26.923,17.074 ccw(c26.746,17.251) 26.923,17.427 26.237,18.113 cw(c26.45,18.325) 26.237,18.537 26.9,19.2 28.856,21.156 ccw(c27.06,22.952) 29.6,22.952 29.6,23.876 ccw(c28.576,23.876) 29.3,24.6 cw(c30.507,25.807) 28.8,25.807 J1.23
IN5_FASTIC1: IC12.1 J1.18 | length 23.5
  Bottom Layer w0.3: J1.18 31.2,37.9 cw(c32.8,37.9) 32.8,39.5 33.05,39.5 33.2,39.5 ccw(c33.2,39.8) 33.5,39.8 33.5,41.105 cw(c33.75,41.105) 34,41.105 34,38.6 ccw(c34.25,38.6) 34.5,38.6 34.5,41.105 cw(c34.75,41.105) 35,41.105 35,39.585 ccw(c35.3,39.585) 35.166,39.317 36,38.9 cw(c34.8,38) 36.1,38.748 cw(c35.69,38.338) 36.15,38.691 cw(c35.69,38.338) 36.27,38.338 IC12.1 ccw(c36.27,37.03) 36.3,37.03 36.3,38
IN5_FASTIC2: IC13.1 J1.25 | length 22.6
  Bottom Layer w0.3: IC13.1 23.73,20.684 ccw(c24.614,20.684) 24.614,19.8 25.834,19.8 ccw(c25.834,21.166) 26.8,20.2 26.935,20.335 27.178,20.578 ccw(c26.875,20.878) 27.154,21.201 cw(c27.154,21.451) 27.154,21.701 28.406,21.701 ccw(c28.406,21.951) 28.406,22.201 27.87,22.201 cw(c27.87,22.451) 27.87,22.701 28.664,22.701 ccw(c28.664,22.951) 28.664,23.201 27.87,23.201 cw(c27.87,23.451) 27.87,23.701 28.664,23.701 ccw(c28.664,23.951) 28.664,24.201 27.154,24.201 cw(c27.154,24.451) 27.154,24.701 28,24.701 ccw(c28,25.001) 28.3,25.001 28.3,25.651 28.3,26.575 ccw(c28,26.575) 28.217,26.783 28.204,26.796 ccw(c27.987,26.588) 28.2,26.8 cw(c28.683,27.283) 28,27.283 J1.25
IN6_FASTIC1: IC14.1 J1.14 | length 22.5
  Bottom Layer w0.3: J1.14 32.8,33.06 cw(c35.34,33.06) 35.34,35.6 37.648,35.6 ccw(c37.648,38.14) 39.444,36.344 45.526,42.426 ccw(c43.73,44.222) 46.27,44.222 IC14.1
IN6_FASTIC2: IC15.1 J1.29 | length 22.5
  Bottom Layer w0.3: IC15.1 13.73,14.078 cw(c16.27,14.078) 14.474,15.874 19.163,20.563 19.622,21.022 cw(c19.834,20.81) 20.046,21.022 20.482,20.587 ccw(c20.659,20.764) 20.835,20.587 ccw(c20.659,20.764) 20.835,20.94 20.4,21.376 cw(c20.612,21.588) 20.4,21.8 20.75,22.15 22.7,24.1 cw(c24.149,22.651) 24.149,24.7 24.251,24.7 ccw(c24.251,26.749) 25.7,25.3 ccw(c24.01,26.99) 26.4,26.99 J1.29
IN7_FASTIC1: IC16.1 J1.12 | length 22.5
  Bottom Layer w0.3: J1.12 33.6,33.5 cw(c35.1,33.5) 35.1,35 36.431,35 36.456,35.025 39.3,35.025 39.45,35.025 ccw(c39.45,35.325) 39.75,35.325 39.75,35.693 cw(c40,35.693) 40.25,35.693 40.25,33.687 ccw(c40.5,33.687) 40.75,33.687 40.75,36.227 cw(c41,36.227) 41.25,36.227 41.25,35.325 ccw(c41.55,35.325) 41.55,35.025 42.416,35.025 43.243,35.025 ccw(c43.243,37.565) 45.039,35.769 IC16.1
IN7_FASTIC2: IC17.1 J1.31 | length 22.5
  Bottom Layer w0.3: IC17.1 ccw(c13.73,22.97) 13.7,22.97 13.7,21.2 ccw(c14.8,21.2) 14.8,20.1 16.648,20.1 ccw(c16.648,22.64) 18.444,20.844 18.75,21.15 19.211,21.611 ccw(c18.999,21.824) 19.211,22.036 18.732,22.515 cw(c18.909,22.692) 18.732,22.869 cw(c18.909,22.692) 19.085,22.869 19.747,22.207 ccw(c19.924,22.384) 20.1,22.207 ccw(c19.924,22.384) 20.1,22.561 19.439,23.222 cw(c19.616,23.399) 19.439,23.576 cw(c19.616,23.399) 19.792,23.576 20.272,23.096 ccw(c20.484,23.308) 20.696,23.096 21.156,23.556 22.505,24.905 cw(c23.7,23.71) 23.7,25.4 23.851,25.4 ccw(c23.851,27.449) 25.3,26 ccw(c24.576,26.724) 25.6,26.724 J1.31
NetC1_2: C1.2 C2.2 R1.2 R2.1
NetC3_2: C3.2 C4.2 IC1.2 R2.2 | length 7.7
  Top Layer w0.5: C4.2 C3.2 R2.2 12.9,38.7 cw(c12.9,37.85) 13.75,37.85 13.75,37.02 cw(c13.73,37.02) IC1.2
NetC5_2: C5.2 C6.2 R3.2 R4.1
NetC7_2: C7.2 C8.2 IC3.2 R4.2 | length 7.7
  Top Layer w0.5: IC3.2 ccw(c46.27,22.98) 46.25,22.98 46.25,22.15 ccw(c47.1,22.15) 47.1,21.3 R4.2 C8.2 C7.2
NetC9_2: C9.2 C10.2 R5.2 R6.1
NetC11_2: C11.2 C12.2 IC4.2 R6.2 | length 7.7
  Top Layer w0.5: C12.2 C11.2 R6.2 12.9,48.7 cw(c12.9,47.85) 13.75,47.85 13.75,47.02 cw(c13.73,47.02) IC4.2
NetC13_2: C13.2 C14.2 R7.2 R8.1
NetC15_2: C15.2 C16.2 IC5.2 R8.2 | length 7.7
  Top Layer w0.5: IC5.2 ccw(c46.27,12.98) 46.25,12.98 46.25,12.15 ccw(c47.1,12.15) 47.1,11.3 R8.2 C16.2 C15.2
NetC17_2: C17.2 C18.2 R9.2 R10.1
NetC19_2: C19.2 C20.2 IC6.2 R10.2 | length 7.7
  Top Layer w0.5: C19.2 C20.2 R10.2 22.9,38.7 cw(c22.9,37.85) 23.75,37.85 23.75,37.02 cw(c23.73,37.02) IC6.2
NetC21_2: C21.2 C22.2 R11.2 R12.1
NetC23_2: C23.2 C24.2 IC7.2 R12.2 | length 7.8
  Top Layer w0.5: IC7.2 ccw(c36.27,22.98) 36.25,22.98 36.25,22.15 ccw(c37.1,22.15) 37.1,21.3 R12.2 C24.2 C23.2
  Bottom Layer w0.3: IC7.2 cw(c36.27,22.97) IC7.2@36.3,22.97
NetC25_2: C25.2 C26.2 R13.2 R14.1
NetC27_2: C27.2 C28.2 IC8.2 R14.2 | length 7.7
  Top Layer w0.5: C28.2 C27.2 R14.2 22.9,48.7 cw(c22.9,47.85) 23.75,47.85 23.75,47.02 cw(c23.73,47.02) IC8.2
NetC29_2: C29.2 C30.2 R15.2 R16.1
NetC31_2: C31.2 C32.2 IC9.2 R16.2 | length 7.7
  Top Layer w0.5: IC9.2 ccw(c36.27,12.98) 36.25,12.98 36.25,12.15 ccw(c37.1,12.15) 37.1,11.3 R16.2 C31.2 C32.2
NetC35_2: C35.2 C36.2 R21.2 R22.1
NetC37_2: C37.2 C38.2 IC10.2 R22.2 | length 7.7
  Top Layer w0.5: C38.2 C37.2 R22.2 32.9,48.7 cw(c32.9,47.85) 33.75,47.85 33.75,47.02 cw(c33.73,47.02) IC10.2
NetC39_2: C39.2 C40.2 R23.2 R24.1
NetC41_2: C41.2 C42.2 IC11.2 R24.2 | length 7.7
  Top Layer w0.5: IC11.2 ccw(c26.27,12.98) 26.25,12.98 26.25,12.15 ccw(c27.1,12.15) 27.1,11.3 R24.2 C42.2 C41.2
NetC43_2: C43.2 C44.2 R25.2 R26.1
NetC45_2: C45.2 C46.2 IC12.2 R26.2 | length 7.7
  Top Layer w0.5: C46.2 C45.2 R26.2 32.9,38.7 cw(c32.9,37.85) 33.75,37.85 33.75,37.02 cw(c33.73,37.02) IC12.2
NetC47_2: C47.2 C48.2 R27.2 R28.1
NetC49_2: C49.2 C50.2 IC13.2 R28.2 | length 7.8
  Top Layer w0.5: IC13.2 ccw(c26.27,22.98) 26.25,22.98 26.25,22.15 ccw(c27.1,22.15) 27.1,21.3 R28.2 C50.2 C49.2
  Bottom Layer w0.3: IC13.2 cw(c26.27,22.97) IC13.2@26.3,22.97
NetC53_2: C53.2 C54.2 R29.2 R30.1
NetC55_2: C55.2 C56.2 IC14.2 R30.2 | length 7.7
  Top Layer w0.5: C55.2 C56.2 R30.2 42.9,48.7 cw(c42.9,47.85) 43.75,47.85 43.75,47.02 cw(c43.73,47.02) IC14.2
NetC57_2: C57.2 C58.2 R31.2 R32.1
NetC59_2: C59.2 C60.2 IC15.2 R32.2 | length 7.7
  Top Layer w0.5: IC15.2 ccw(c16.27,12.98) 16.25,12.98 16.25,12.15 ccw(c17.1,12.15) 17.1,11.3 R32.2 C59.2 C60.2
NetC61_2: C61.2 C62.2 R33.2 R34.1
NetC63_2: C63.2 C64.2 IC16.2 R34.2 | length 7.7
  Top Layer w0.5: C64.2 C63.2 R34.2 42.9,38.7 cw(c42.9,37.85) 43.75,37.85 43.75,37.02 cw(c43.73,37.02) IC16.2
NetC65_2: C65.2 C66.2 R35.2 R36.1
NetC67_2: C67.2 C68.2 IC17.2 R36.2 | length 7.7
  Top Layer w0.5: IC17.2 ccw(c16.27,22.98) 16.25,22.98 16.25,22.15 ccw(c17.1,22.15) 17.1,21.3 R36.2 C67.2 C68.2
NetJ1_05: J1.05
NetJ1_06: J1.06
NetJ1_07: J1.07
NetJ1_08: J1.08
pads on no net: FTG1.1 FTG2.1 FTG3.1 FTG4.1 FTG5.1 FTG6.1 J1. J1.S1 J1.S2

## Polygon pours and split planes (outlines as drawn)
GND on Bottom Layer "GND_L04_P026" (solid, pour order 26): -10,70 -10,-10 70,-10 70,70
+3V3 on Bottom Layer "+3V3_L04_P000" (solid, pour order 0): 20.475,34.325 7.5,34.325 7.5,25.675 20.475,25.675 20.475,26.625 21.05,27.2 22.65,27.2 22.65,32.8 21.05,32.8 20.475,33.375
HV on Bottom Layer "HV_L04_P023" (solid, pour order 23): 36.55,32.8 36.725,32.975 36.725,34.375 37.85,34.375 37.85,31.7 36.55,31.7
HV on Bottom Layer "HV_L04_P024" (solid, pour order 24): 36.55,32.8 36.55,27.2 37.85,27.2 37.85,32.8
HV on Bottom Layer "HV_L04_P021" (solid, pour order 21): 36.55,27.2 36.725,27.025 36.725,25.625 37.85,25.625 37.85,28.3 36.55,28.3
GND on Top Layer "GND_L01_P022" (solid, pour order 22): -10,70 -10,-10 70,-10 70,70
NetC65_2 on Top Layer "NETC65_2_L01_P014" (solid, pour order 14): 21.375,22.375 21.375,25.125 18.6,25.125 18.6,22.375
NetC47_2 on Top Layer "NETC47_2_L01_P015" (solid, pour order 15): 31.375,22.375 31.375,25.125 28.6,25.125 28.6,22.375
NetC21_2 on Top Layer "NETC21_2_L01_P020" (solid, pour order 20): 41.375,22.375 41.375,25.125 38.6,25.125 38.6,22.375
NetC29_2 on Top Layer "NETC29_2_L01_P019" (solid, pour order 19): 41.375,12.375 41.375,15.125 38.6,15.125 38.6,12.375
NetC13_2 on Top Layer "NETC13_2_L01_P018" (solid, pour order 18): 51.375,12.375 51.375,15.125 48.6,15.125 48.6,12.375
NetC5_2 on Top Layer "NETC5_2_L01_P017" (solid, pour order 17): 51.375,22.375 51.375,25.125 48.6,25.125 48.6,22.375
NetC39_2 on Top Layer "NETC39_2_L01_P016" (solid, pour order 16): 31.375,12.375 31.375,15.125 28.6,15.125 28.6,12.375
NetC57_2 on Top Layer "NETC57_2_L01_P013" (solid, pour order 13): 21.375,12.375 21.375,15.125 18.6,15.125 18.6,12.375
NetC1_2 on Top Layer "NETC1_2_L01_P011" (solid, pour order 11): 8.625,37.625 8.625,34.875 11.4,34.875 11.4,37.625
NetC9_2 on Top Layer "NETC9_2_L01_P010" (solid, pour order 10): 8.625,47.625 8.625,44.875 11.4,44.875 11.4,47.625
NetC17_2 on Top Layer "NETC17_2_L01_P009" (solid, pour order 9): 18.625,37.625 18.625,34.875 21.4,34.875 21.4,37.625
NetC25_2 on Top Layer "NETC25_2_L01_P008" (solid, pour order 8): 18.625,47.625 18.625,44.875 21.4,44.875 21.4,47.625
NetC43_2 on Top Layer "NETC43_2_L01_P007" (solid, pour order 7): 28.625,37.625 28.625,34.875 31.4,34.875 31.4,37.625
NetC35_2 on Top Layer "NETC35_2_L01_P006" (solid, pour order 6): 28.625,47.625 28.625,44.875 31.4,44.875 31.4,47.625
NetC53_2 on Top Layer "NETC53_2_L01_P004" (solid, pour order 4): 38.625,47.625 38.625,44.875 41.4,44.875 41.4,47.625
NetC61_2 on Top Layer "NETC61_2_L01_P003" (solid, pour order 3): 38.625,37.625 38.625,34.875 41.4,34.875 41.4,37.625
GND on GND (split plane): 57.695,59.482 57.889,59.454 58.078,59.406 58.262,59.34 58.439,59.257 58.607,59.156 58.764,59.04 58.908,58.908 59.04,58.764 59.156,58.607 59.257,58.439 59.34,58.262 59.406,58.078 59.454,57.889 59.482,57.695 59.491,57.516 59.49,57.5 59.49,2.5 59.491,2.484 59.482,2.305 59.454,2.111 59.406,1.922 59.34,1.738 59.257,1.561 59.156,1.393 59.04,1.236 58.908,1.092 58.764,0.96 58.607,0.844 58.439,0.743 58.262,0.66 58.078,0.594 57.889,0.546 57.695,0.518 57.516,0.509 57.5,0.51 2.5,0.51 2.484,0.509 2.305,0.518 2.111,0.546 1.922,0.594 1.738,0.66 1.561,0.743 1.393,0.844 1.236,0.96 1.092,1.092 0.96,1.236 0.844,1.393 0.743,1.561 0.66,1.738 0.594,1.922 0.546,2.111 0.518,2.305 0.509,2.484 0.51,2.5 0.51,57.5 0.509,57.516 0.518,57.695 0.546,57.889 0.594,58.078 0.66,58.262 0.743,58.439 0.844,58.607 0.96,58.764 1.092,58.908 1.236,59.04 1.393,59.156 1.561,59.257 1.738,59.34 1.922,59.406 2.111,59.454 2.305,59.482 2.484,59.491 2.5,59.49 57.5,59.49 57.516,59.491
HV on HV (split plane): 57.695,59.482 57.889,59.454 58.078,59.406 58.262,59.34 58.439,59.257 58.607,59.156 58.764,59.04 58.908,58.908 59.04,58.764 59.156,58.607 59.257,58.439 59.34,58.262 59.406,58.078 59.454,57.889 59.482,57.695 59.491,57.516 59.49,57.5 59.49,2.5 59.491,2.484 59.482,2.305 59.454,2.111 59.406,1.922 59.34,1.738 59.257,1.561 59.156,1.393 59.04,1.236 58.908,1.092 58.764,0.96 58.607,0.844 58.439,0.743 58.262,0.66 58.078,0.594 57.889,0.546 57.695,0.518 57.516,0.509 57.5,0.51 2.5,0.51 2.484,0.509 2.305,0.518 2.111,0.546 1.922,0.594 1.738,0.66 1.561,0.743 1.393,0.844 1.236,0.96 1.092,1.092 0.96,1.236 0.844,1.393 0.743,1.561 0.66,1.738 0.594,1.922 0.546,2.111 0.518,2.305 0.509,2.484 0.51,2.5 0.51,57.5 0.509,57.516 0.518,57.695 0.546,57.889 0.594,58.078 0.66,58.262 0.743,58.439 0.844,58.607 0.96,58.764 1.092,58.908 1.236,59.04 1.393,59.156 1.561,59.257 1.738,59.34 1.922,59.406 2.111,59.454 2.305,59.482 2.484,59.491 2.5,59.49 57.5,59.49 57.516,59.491

## Silkscreen, mask and mechanical layers (free items; w line width, h text height)
Top Overlay:
  drawing of 156 lines, arcs and shapes, not listed
  text "FastIC+ Readout Userboard" at 20.336,56.6 h0.8
  text "V1.0   11/2024" at 24.802,55.3 h0.8
  text "IC1 IN1" at 12.084,48.8 h1
  text "IC1 IN3" at 21.918,48.8 h1
  text "IC1 IN4" at 31.918,48.8 h1
  text "IC1 IN6" at 41.918,48.8 h1
  text "C" at 13.833,45.1 h0.8
  text "A" at 15.633,45.1 h0.8
  text "C" at 23.833,45.1 h0.8
  text "A" at 25.633,45.1 h0.8
  text "C" at 33.833,45.1 h0.8
  text "A" at 35.633,45.1 h0.8
  text "C" at 43.833,45.1 h0.8
  text "A" at 45.633,45.1 h0.8
  text "IC1 IN0" at 11.918,38.8 h1
  text "IC1 IN2" at 21.918,38.8 h1
  text "IC1 IN5" at 31.918,38.8 h1
  text "IC1 IN7" at 41.918,38.8 h1
  text "C" at 13.833,35.1 h0.8
  text "A" at 15.633,35.1 h0.8
  text "C" at 23.833,35.1 h0.8
  text "A" at 25.633,35.1 h0.8
  text "C" at 33.833,35.1 h0.8
  text "A" at 35.633,35.1 h0.8
  text "C" at 43.833,35.1 h0.8
  text "A" at 45.633,35.1 h0.8
  text "A" at 13.833,24.1 h0.8
  text "C" at 15.633,24.1 h0.8
  text "A" at 23.833,24.1 h0.8
  text "C" at 25.633,24.1 h0.8
  text "A" at 33.833,24.1 h0.8
  text "C" at 35.633,24.1 h0.8
  text "A" at 43.833,24.1 h0.8
  text "C" at 45.633,24.1 h0.8
  text "IC2 IN7" at 11.834,20.2 h1
  text "IC2 IN5" at 21.834,20.2 h1
  text "IC2 IN2" at 31.834,20.2 h1
  text "IC2 IN0" at 41.834,20.2 h1
  text "A" at 13.833,14.1 h0.8
  text "C" at 15.633,14.1 h0.8
  text "A" at 23.833,14.1 h0.8
  text "C" at 25.633,14.1 h0.8
  text "A" at 33.833,14.1 h0.8
  text "C" at 35.633,14.1 h0.8
  text "A" at 43.833,14.1 h0.8
  text "C" at 45.633,14.1 h0.8
  text "IC2 IN6" at 11.834,10.2 h1
  text "IC2 IN4" at 21.834,10.2 h1
  text "IC2 IN3" at 31.834,10.2 h1
  text "IC2 IN1" at 42.001,10.2 h1
  text "CERN" at 24.283,4.26 h0.8
  text "Vojtech" at 30.801,2.933 h0.8
  text "Vosahlo" at 30.801,1.5 h0.8
Top Solder:
  lines w1.6: 0,2.5 ccw(c2.5,2.5) 2.5,0 57.5,0 ccw(c57.5,2.5) 60,2.5 60,57.5 ccw(c57.5,57.5) 57.5,60 2.5,60 ccw(c2.5,57.5) 0,57.5 0,2.5
  lines w2: 0.009,3.56 2.5,3.56 cw(c2.5,2.5) 3.56,2.5 3.56,0.009 ; 0.009,56.44 2.5,56.44 ccw(c2.5,57.5) 3.56,57.5 3.56,59.991 ; 56.44,0.009 56.44,2.5 cw(c57.5,2.5) 57.5,3.56 59.991,3.56 ; 56.44,59.991 56.44,57.5 ccw(c57.5,57.5) 57.5,56.44 59.991,56.44
Bottom Solder:
  lines w1.6: 0,2.5 ccw(c2.5,2.5) 2.5,0 57.5,0 ccw(c57.5,2.5) 60,2.5 60,57.5 ccw(c57.5,57.5) 57.5,60 2.5,60 ccw(c2.5,57.5) 0,57.5 0,2.5
  lines w2: 0.009,3.56 2.5,3.56 cw(c2.5,2.5) 3.56,2.5 3.56,0.009 ; 0.009,56.44 2.5,56.44 ccw(c2.5,57.5) 3.56,57.5 3.56,59.991 ; 56.44,0.009 56.44,2.5 cw(c57.5,2.5) 57.5,3.56 59.991,3.56 ; 56.44,59.991 56.44,57.5 ccw(c57.5,57.5) 57.5,56.44 59.991,56.44
Mechanical 1:
  the board outline again, w0.2
Route Tool Path:
  lines w2: -1,9.6 -1,2.5 ccw(c2.5,2.5) 2.5,-1 9.6,-1 ; -1,15.4 -1,44.6 ; -1,50.4 -1,57.5 cw(c2.5,57.5) 2.5,61 9.6,61 ; 15.4,-1 44.6,-1 ; 15.4,61 44.6,61 ; 50.4,-1 57.5,-1 ccw(c57.5,2.5) 61,2.5 61,9.6 ; 50.4,61 57.5,61 cw(c57.5,57.5) 61,57.5 61,50.4 ; 61,15.4 61,44.6
Mechanical 5: